# Altium PCB WARROX_final.PcbDoc
Units mm, origin at the board's own origin, x right, y up, seen from the top; angles counter-clockwise.
Board outline 40 x 40 mm, 4 copper layers (L1 (Sig), L2 (GND), L3 (GND), L4 (Sig)), stack 1.57 mm thick; 84 components, 49 nets, 286 pads, 167 vias.
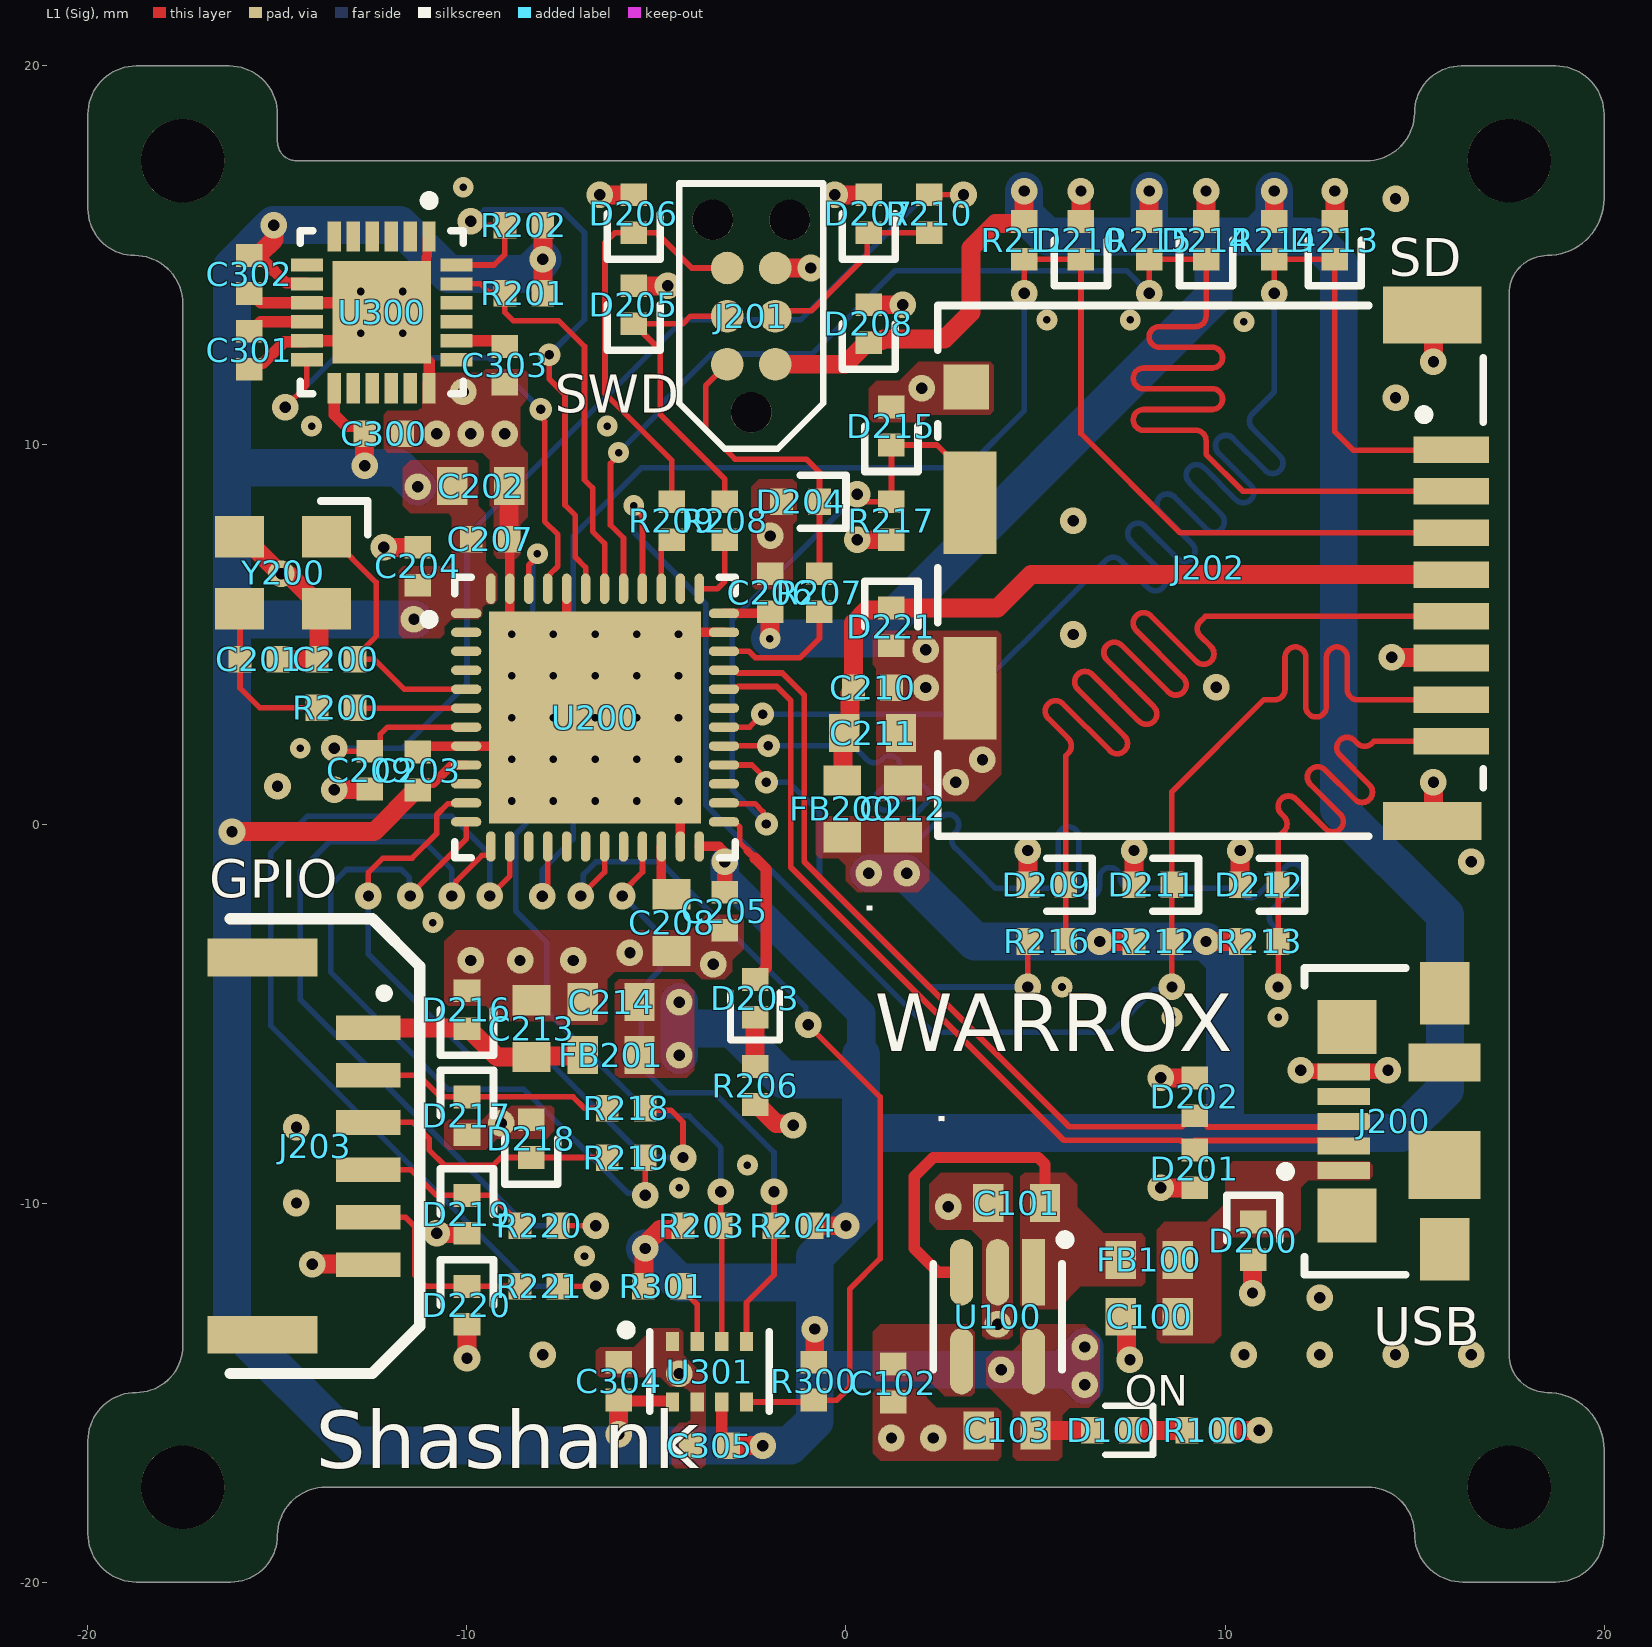
[diagram p0: L1 (Sig) view]
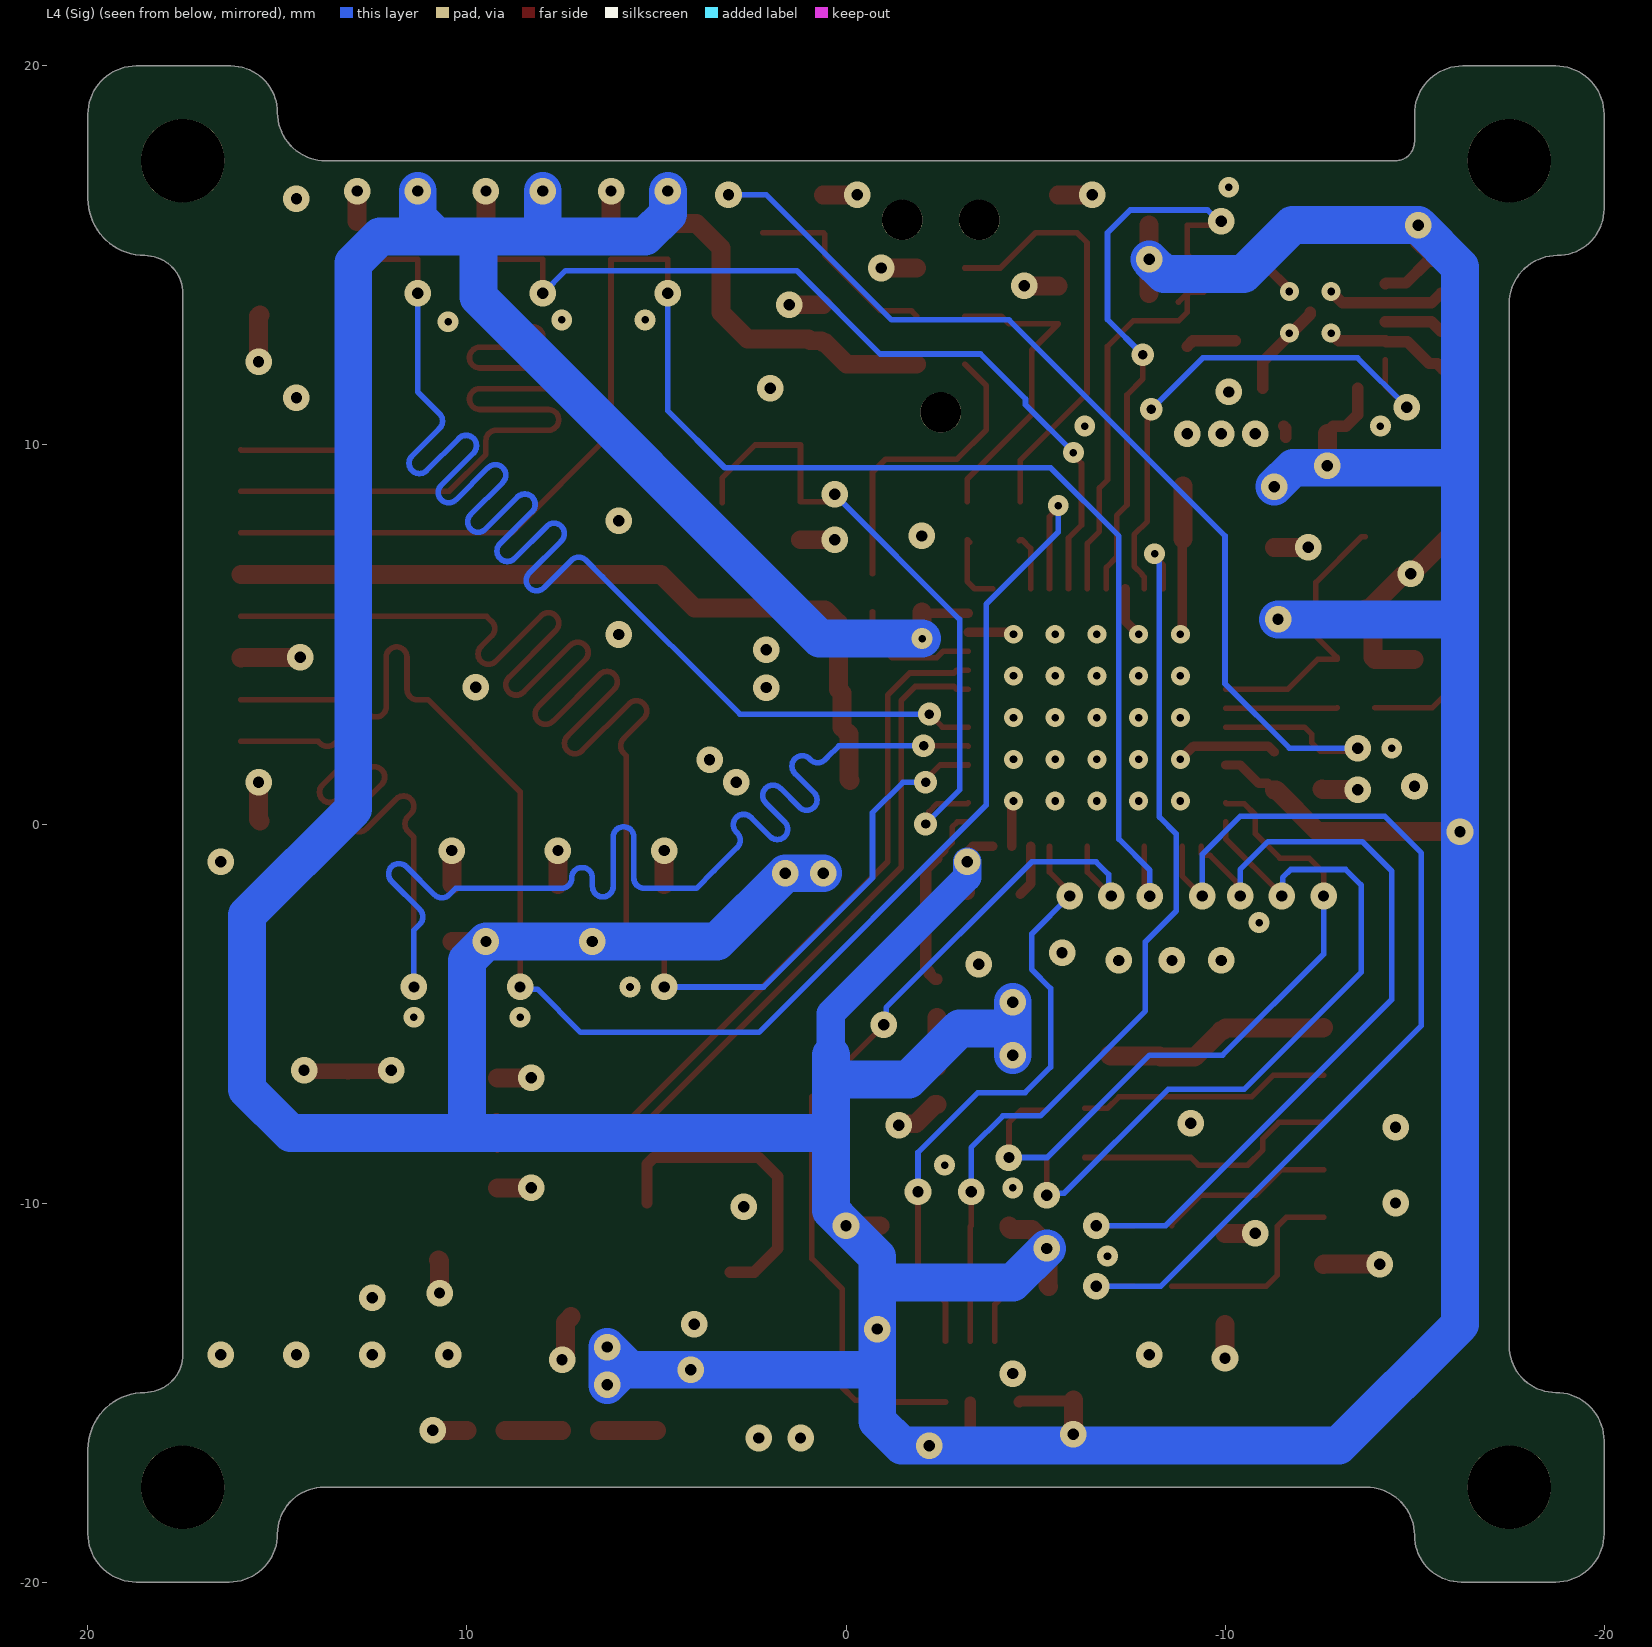
[diagram p1: L4 (Sig) view, seen from below]
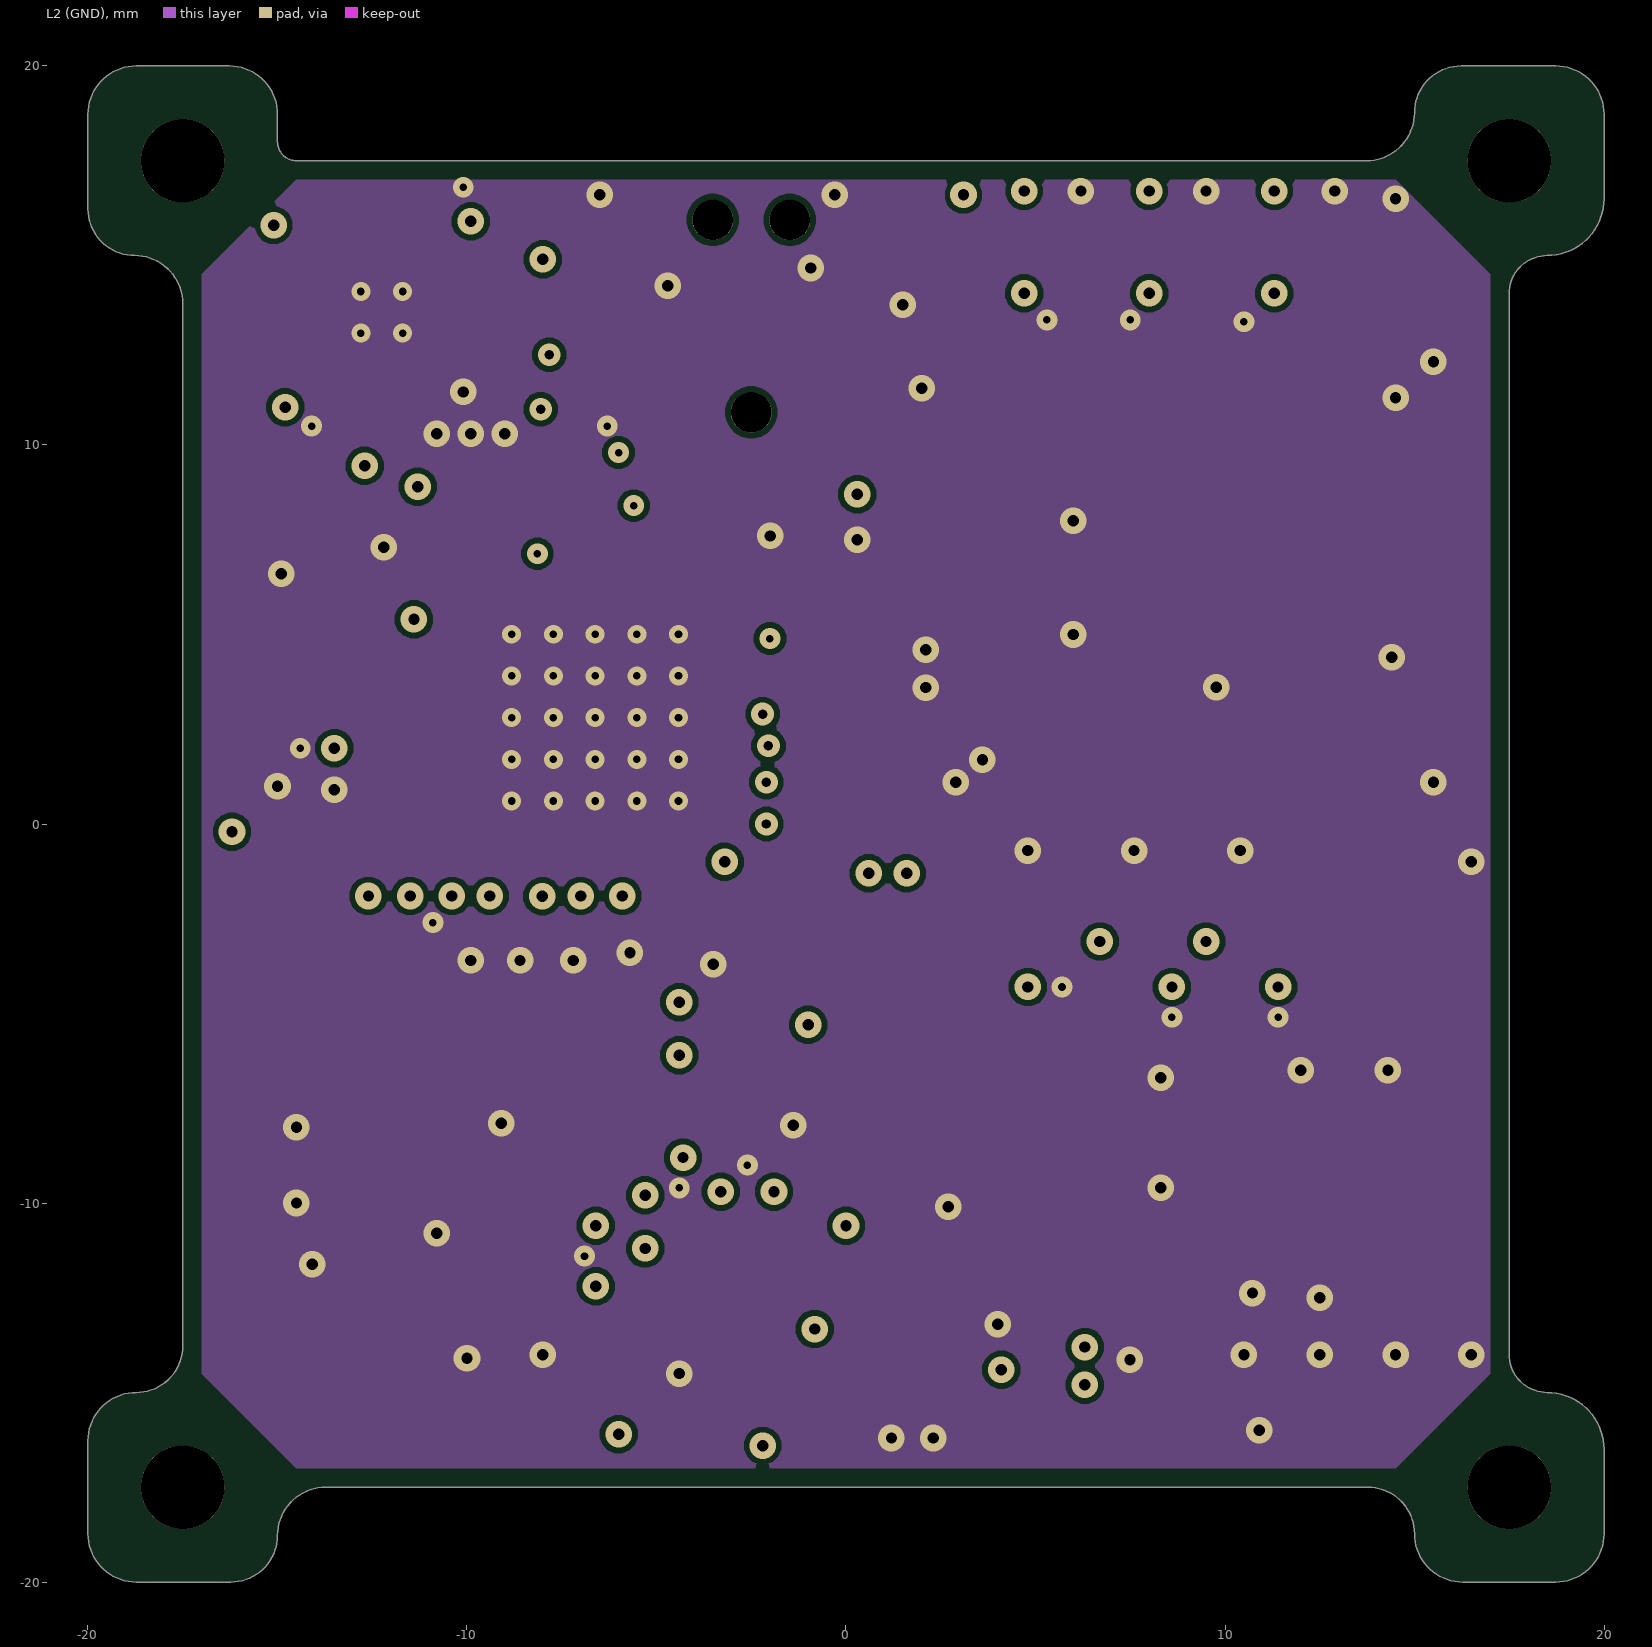
[diagram p2: L2 (GND)]
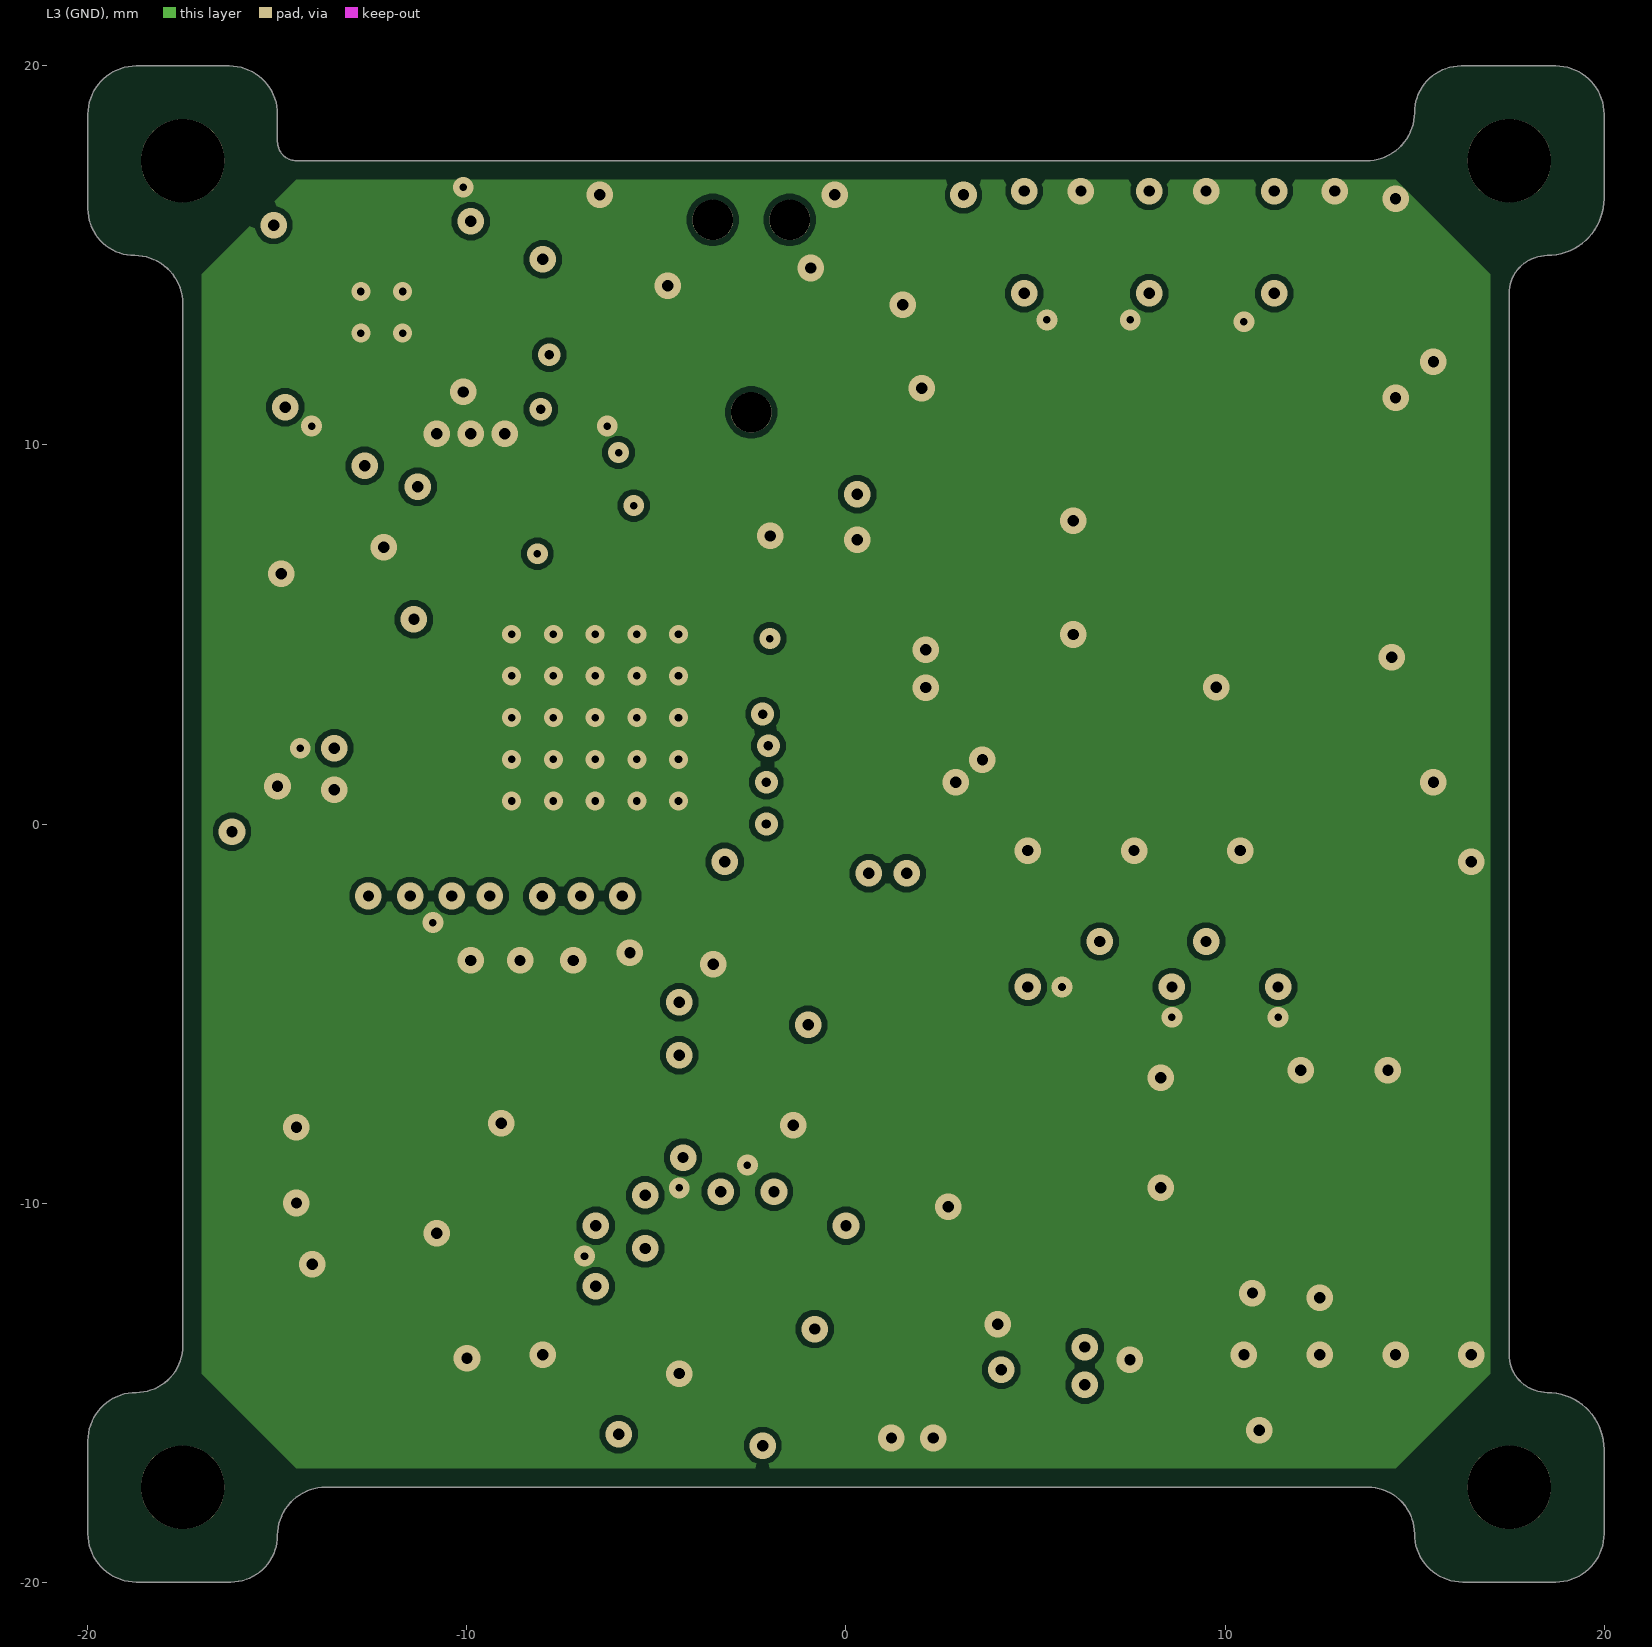
[diagram p3: L3 (GND)]
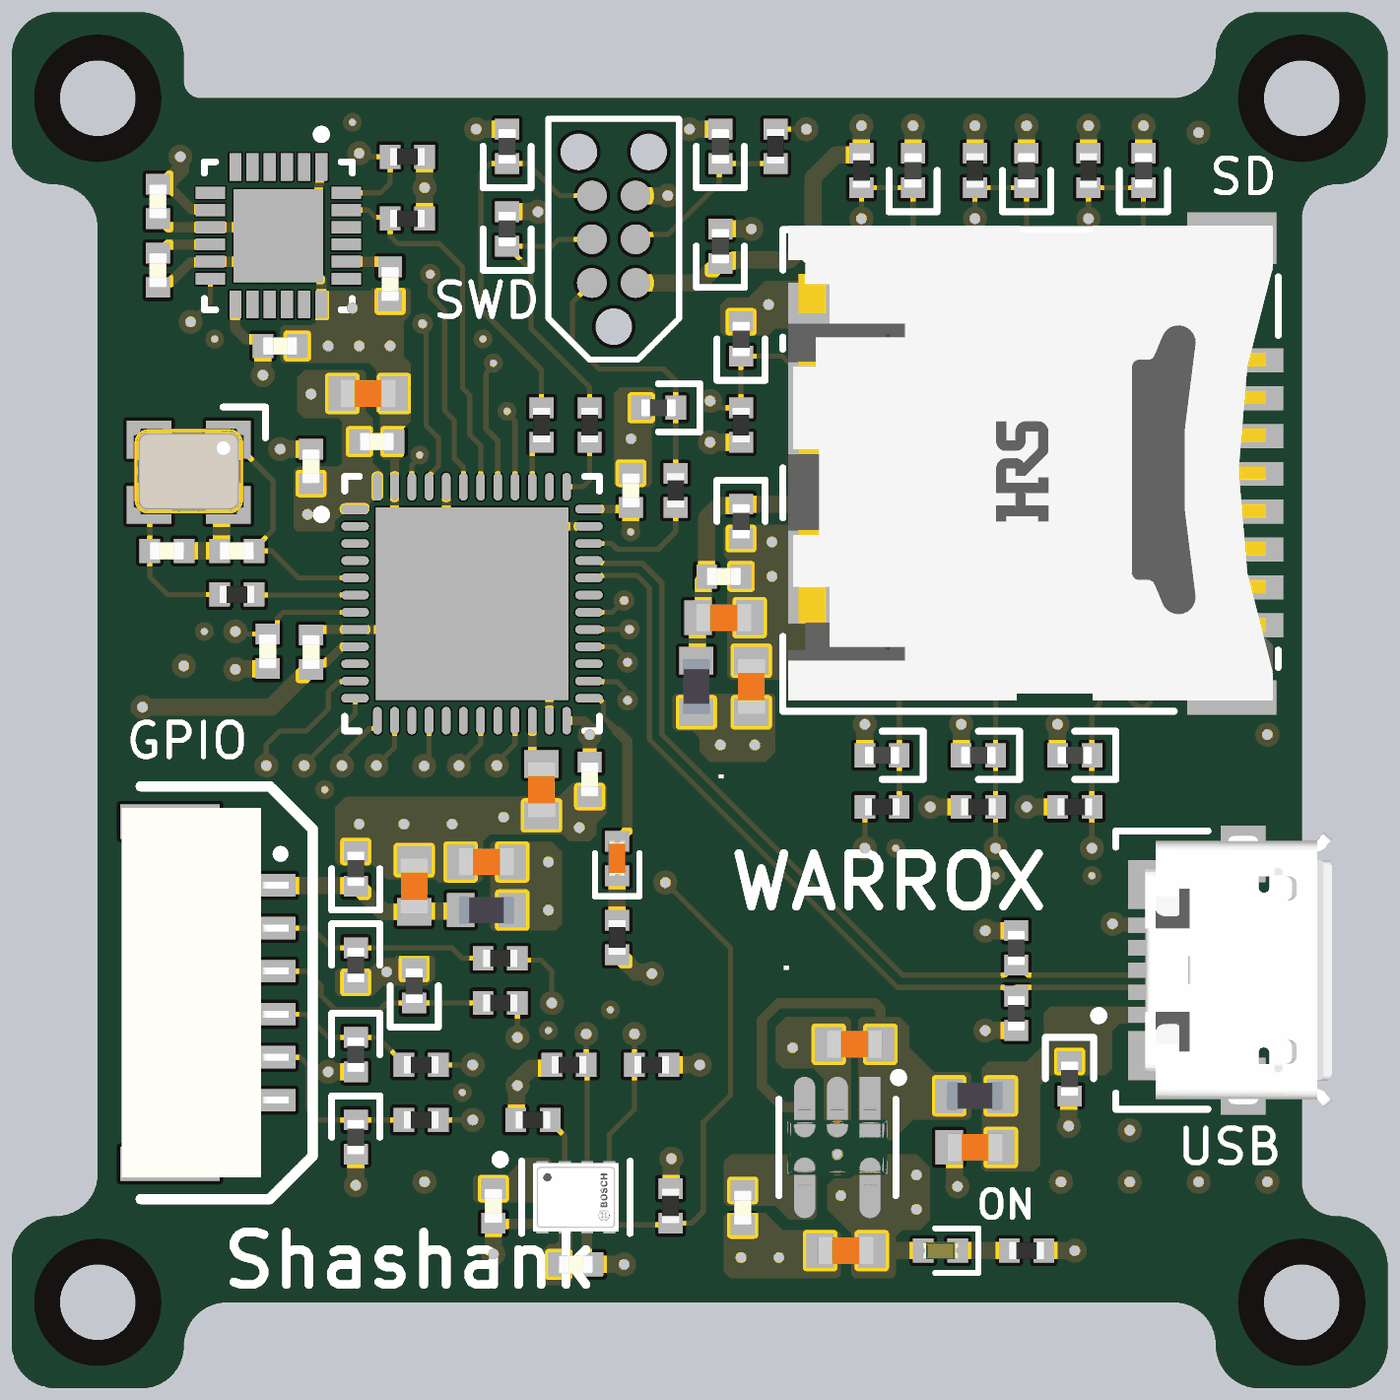
[diagram p4: 3D render of the assembled board from above, using the file's embedded part models]

## Layer stack, top to bottom
Top Solder: solder mask 0.0254, SM-001, Dk 4
L1 (Sig): signal copper 0.035
Dielectric 2: prepreg 0.1, PP-017, Dk 4.6
L2 (GND): signal copper 0.0175
Dielectric 3: core 1.265, Core-039, Dk 4.6
L3 (GND): signal copper 0.0175
Dielectric 4: prepreg 0.1, PP-017, Dk 4.6
L4 (Sig): signal copper 0.035
Bottom Solder: solder mask 0.0254, SM-001, Dk 4

## Board outline
-20,-18.73 -20,-16.27 cw(c-18.73,-16.27) -18.73,-15 ccw(c-18.73,-13.77) -17.5,-13.77 -17.5,13.73 ccw(c-18.77,13.73) -18.77,15 cw(c-18.77,16.23) -20,16.23 -20,18.73 cw(c-18.73,18.73) -18.73,20 -16.27,20 cw(c-16.27,18.73) -15,18.73 -15,18 ccw(c-14.5,18) -14.5,17.5 13.73,17.5 ccw(c13.73,18.77) 15,18.77 cw(c16.23,18.77) 16.23,20 18.73,20 cw(c18.73,18.73) 20,18.73 20,16.5 cw(c18.5,16.5) 18.5,15 ccw(c18.5,14) 17.5,14 17.5,-14 ccw(c18.5,-14) 18.5,-15 cw(c18.5,-16.5) 20,-16.5 20,-18.73 cw(c18.73,-18.73) 18.73,-20 16.27,-20 cw(c16.27,-18.73) 15,-18.73 ccw(c13.77,-18.73) 13.77,-17.5 -13.73,-17.5 ccw(c-13.73,-18.77) -15,-18.77 cw(c-16.23,-18.77) -16.23,-20 -18.73,-20 cw(c-18.73,-18.73)

## Design rules (kind name [scope] priority, off if disabled: settings)
Clearance [All] p1: gap=0.15 ignorepadtopadclearanceinfootprint=FALSE
DiffPairsRouting [All] p1: maxlimit=0.254 minlimit=0.203 mostfreqgap=0.254 toplayer_maxgap=0.203 toplayer_prefgap=0.203 toplayer_minwidth=0.153 toplayer_maxwidth=0.153 toplayer_prefwidth=0.153 bottomlayer_maxgap=0.203 bottomlayer_prefgap=0.203 bottomlayer_minwidth=0.153 bottomlayer_maxwidth=0.153 bottomlayer_prefwidth=0.153 impedanceprofiledriven=TRUE impedanceprofileid={C68166D5-ADCB-4A58-9F66-7FDBBDD7FCB3} impedanceprofilevalue=90.000000 maxuncoupledlength=12.7
PolygonConnect [All] p1: connectstyle=Direct reliefconductorwidth=0.254 reliefentries=4 polygonreliefangle="90 Angle" airgapwidth=0.254
RoutingVias [All] p1: holewidth=0.711 width=1.27 viastyle="Through Hole" minholewidth=0.711 minwidth=1.27 maxholewidth=0.711 maxwidth=1.27
SolderMaskExpansion [All] p1: expansion=0.102 istentingtop=FALSE
Width [All] p1: maxlimit=1 minlimit=0.127 preferedwidth=0.293 midlayer1_maxwidth=0.254 midlayer1_prefwidth=0.254 midlayer2_maxwidth=0.254 midlayer2_prefwidth=0.254 minimp=50.000000 maximp=50.000000 favimp=50.000000
29 further rules are at their usual default settings.

## Classes and differential pairs
net class USB: MCU_USB_D_N MCU_USB_D_P
net class SD: MCU_SDIO_CK MCU_SDIO_CMD MCU_SDIO_D0 MCU_SDIO_D1 MCU_SDIO_D2 MCU_SDIO_D3 SD_CLK
differential pair class DIFF_USB_FS: MCU_USB_D
differential pair MCU_USB_D: +MCU_USB_D_P -MCU_USB_D_N

## Components (designator, comment, footprint, x,y, rotation, side; value= is the part's Value field where it differs from the comment)
C100 "2u2" CAP_0603 8,-13 r0 top
C101 "2u2" CAP_0603 4.5,-10 r0 top
C102 "470p" CAP_0402 1.25,-14.75 r90 top
C103 "2u2" CAP_0603 4.25,-16 r0 top
C200 "10p" CAP_0402 -13.457,4.343 r0 top
C201 "10p" CAP_0402 -15.489,4.343 r180 top
C202 "2u2" CAP_0603 -9.639,8.915 r180 top
C203 "100n" CAP_0402 -11.3,1.4 r270 top
C204 "100n" CAP_0402 -11.3,6.8 r270 top
C205 "100n" CAP_0402 -3.2,-2.3 r90 top
C206 "100n" CAP_0402 -2,6.1 r270 top
C207 "100n" CAP_0402 -9.385,7.518 r180 top
C208 "2u2" CAP_0603 -4.6,-2.6 r90 top
C209 "100n" CAP_0402 -12.56,1.422 r90 top
C210 "100n" CAP_0402 0.7,3.6 r180 top
C211 "2u2" CAP_0603 0.7,2.4 r180 top
C212 "2u2" CAP_0603 1.5,0.4 r270 top
C213 "2u2" CAP_0603 -8.3,-5.4 r270 top
C214 "2u2" CAP_0603 -6.2,-4.7 r0 top
C300 "100n" CAP_0402 -12.2,10.3 r180 top
C301 "100n" CAP_0402 -15.75,12.5 r90 top
C302 "10n" CAP_0402 -15.75,14.5 r90 top
C303 "2n2" CAP_0402 -9,12.1 r90 top
C304 "100n" CAP_0402 -6,-14.7 r270 top
C305 "100n" CAP_0402 -3.6,-16.4 r0 top
D100 "GREEN" LED_0402_GREEN 7,-16 r0 top
D200 "RCLAMP0521P-N" D_0402 10.75,-11 r90 top
D201 "RCLAMP0521P-N" D_0402 9.2,-9.1 r90 top
D202 "RCLAMP0521P-N" D_0402 9.2,-7.2 r270 top
D203 "RED" LED_0402_RED -2.4,-4.6 r270 top
D204 "RCLAMP0521P-N" D_0402 -1.2,8.5 r0 top
D205 "RCLAMP0521P-N" D_0402 -5.6,13.7 r270 top
D206 "RCLAMP0521P-N" D_0402 -5.6,16.1 r270 top
D207 "RCLAMP0521P-N" D_0402 0.6,16.1 r270 top
D208 "RCLAMP0521P-N" D_0402 0.6,13.2 r270 top
D209 "RCLAMP0521P-N" D_0402 5.3,-1.6 r0 top
D210 "RCLAMP0521P-N" D_0402 6.2,15.4 r270 top
D211 "RCLAMP0521P-N" D_0402 8.1,-1.6 r0 top
D212 "RCLAMP0521P-N" D_0402 10.9,-1.6 r0 top
D213 "RCLAMP0521P-N" D_0402 12.9,15.4 r270 top
D214 "RCLAMP0521P-N" D_0402 9.5,15.4 r270 top
D215 "RCLAMP0521P-N" D_0402 1.2,10.5 r270 top
D216 "RCLAMP0521P-N" D_0402 -10,-4.9 r270 top
D217 "RCLAMP0521P-N" D_0402 -10,-7.7 r90 top
D218 "RCLAMP0521P-N" D_0402 -8.3,-8.3 r270 top
D219 "RCLAMP0521P-N" D_0402 -10,-10.3 r90 top
D220 "RCLAMP0521P-N" D_0402 -10,-12.7 r90 top
D221 "RCLAMP0521P-N" D_0402 1.2,5.2 r90 top
FB100 "100R" FB_0603 8,-11.5 r180 top
FB200 "100R" FB_0603 -0.1,0.4 r270 top
FB201 "100R" FB_0603 -6.2,-6.1 r0 top
J200 "473460001" FP-473460001-MFG 15.447,-7.844 r90 top
J201 "TC-2030NL" TC2030-NL-FP -2.5,13.4 r90 top
J202 "DM3CS-SF" FP-DM3CS-SF-MFG 9.617,6.68 r90 top locked
J203 "SM06B-GHS-TB" SM06B-GHS-TB -14,-8.5 r270 top
R100 "1k" RES_0402 9.5,-16 r180 top
R200 "22R" RES_0402 -13.457,3.073 r0 top
R201 "2k2" RES_0402 -8.5,14 r0 top
R202 "2k2" RES_0402 -8.5,15.8 r0 top
R203 "2k2" RES_0402 -3.8,-10.6 r180 top
R204 "2k2" RES_0402 -1.4,-10.6 r0 top
R206 "1k" RES_0402 -2.4,-6.9 r90 top
R207 "22R" RES_0402 -0.7,6.1 r90 top
R208 "22R" RES_0402 -3.2,8 r90 top
R209 "22R" RES_0402 -4.6,8 r90 top
R210 "22R" RES_0402 2.2,16.1 r270 top
R211 "10k" RES_0402 4.7,15.4 r90 top
R212 "10k" RES_0402 8.1,-3.1 r180 top
R213 "10k" RES_0402 10.9,-3.1 r180 top
R214 "10k" RES_0402 11.3,15.4 r90 top
R215 "10k" RES_0402 8,15.4 r90 top
R216 "22R" RES_0402 5.3,-3.1 r180 top
R217 "1M" RES_0402 1.2,8 r90 top
R218 "22R" RES_0402 -5.8,-7.5 r0 top
R219 "22R" RES_0402 -5.8,-8.8 r0 top
R220 "22R" RES_0402 -8.1,-10.6 r0 top
R221 "22R" RES_0402 -8.1,-12.2 r0 top
R300 "10k" RES_0402 -0.85,-14.7 r90 top
R301 "10k" RES_0402 -4.85,-12.2 r180 top
U100 "MIC5219-3.3YM5-TR" FP-SOT23-5LD-PL-1-IPC_A 4,-13 r270 top
U200 "STM32F411CEU6" STM-UFQFPN48_L -6.62,2.807 r0 top
U300 "MPU-6050" IS-QFN-24_V -12.25,13.5 r270 top
U301 "SPL06-001" FP-BMP280-MFG -3.6,-14.45 r90 top
Y200 "16MHz" XTAL_3225 -14.854,6.629 r180 top value=24MHz

## Footprints (in the part's own frame and the unit in brackets; to place one, negate y for a bottom-side part, rotate by r counter-clockwise, add the part's x,y. Pads: shape width x height; smd on the part's side, far side on the other; paste and mask are expansions set on the pad)
CAP_0402 [mm]
  rect 0.6x0.7 smd: 1(-0.5,0) 2(0.5,0)
  body extent -0.5,-0.26 0.5,0.26, height 0.37
CAP_0603 [mm]
  rect 0.8x1 smd: 1(-0.75,0) 2(0.75,0)
  body extent -0.8,-0.4 0.8,0.4, height 0.51
D_0402 [mm]
  rect 0.6x0.7 smd: A(-0.5,0) K(0.5,0)
  silkscreen extent 0,-0.7 1.2,0.7, body extent -0.5,-0.25 0.5,0.25, height 0.51
FB_0603 [mm]
  rect 0.8x1 smd: 1(-0.75,0) 2(0.75,0)
  body extent -0.8,-0.4 0.8,0.4, height 0.81
FP-473460001-MFG [mm]
  rect 0.45x1.38 smd paste+0 mask+0: 1(-1.3,2.31) 2(-0.65,2.31) 3(0,2.31) 4(0.65,2.31) 5(1.3,2.31)
  rect 1.425x1.55 smd paste+0 mask+0: 6(-2.488,2.225) 7(2.488,2.225)
  rect 1.65x1.3 smd paste+0 mask+0: 8(-3.375,-0.35) 11(3.375,-0.35)
  rect 1.8x1.9 smd paste+0 mask+0: 9(-1.15,-0.35)
  rect 1x1.9 smd paste+0 mask+0: 10(1.55,-0.35)
  silkscreen extent -4.05,0.67 4.05,3.97, body extent -4.3,-2.48 4.3,3.45, height 0.25
FP-BMP280-MFG [mm]
  rect 0.5x0.35 smd paste+0 mask+0: 1(0.8,0.975) 2(0.8,0.325) 3(0.8,-0.325) 4(0.8,-0.975) 5(-0.8,-0.975) 6(-0.8,-0.325) 7(-0.8,0.325) 8(-0.8,0.975)
  silkscreen extent -1.05,-1.58 1.22,2.32, body extent -1.55,-1.8 1.55,1.8, height 0.25
FP-DM3CS-SF-MFG [mm]
  rect 0.7x2 smd paste+0 mask+0: 1(3.2,-6.35) 2(2.1,-6.35) 3(1,-6.35) 4(-0.1,-6.35) 5(-1.2,-6.35) 6(-2.3,-6.35) 7(-3.4,-6.35) 8(-4.5,-6.35)
  rect 2.7x1.4 smd paste+0 mask+0: 9(-3.1,6.35) 10(1.8,6.35)
  rect 1.2x1.2 smd paste+0 mask+0: 11(4.85,6.45)
  rect 1x2.6 smd paste+0 mask+0: 12(-6.6,-5.85)
  rect 1.5x2.6 smd paste+0 mask+0: 13(6.75,-5.85)
  silkscreen extent -7,-7.2 7,7.2, body extent -6.68,-7.05 7.12,7.05, height 2.13
FP-SOT23-5LD-PL-1-IPC_A [mm]
  rect 1.756x0.61 smd paste+0 mask+0: 1(-1.175,0.95)
  rrect100% 1.756x0.61 smd paste+0 mask+0: 2(-1.175,0) 3(-1.175,-0.95) 4(1.175,-0.95) 5(1.175,0.95)
  silkscreen extent -2.16,-1.7 1.4,1.9, body extent -2.55,-1.95 2.55,1.95, height 0.25
IS-QFN-24_V [mm] "QFN, 24-Leads, Body 4x4mm, Pitch 0.5mm, Thermal Pad 2.7x2.6mm"
  rect 0.8x0.35 smd mask+0.05: 1(-2,1.25) 2(-2,0.75) 3(-2,0.25) 4(-2,-0.25) 5(-2,-0.75) 6(-2,-1.25) 13(2,-1.25) 14(2,-0.75) 15(2,-0.25) 16(2,0.25) 17(2,0.75) 18(2,1.25)
  rect 0.35x0.85 smd mask+0.05: 7(-1.25,-1.975) 8(-0.75,-1.975) 9(-0.25,-1.975) 10(0.25,-1.975) 11(0.75,-1.975) 12(1.25,-1.975) 19(1.25,1.975) 20(0.75,1.975) 21(0.25,1.975) 22(-0.25,1.975) 23(-0.75,1.975) 24(-1.25,1.975)
  rect 2.7x2.6 smd mask+0.05: 25(0,0)
  silkscreen extent -3.07,-2.15 2.15,2.15, body extent -2,-2 2,2, height 0.95
LED_0402_GREEN [mm]
  rect 0.6x0.7 smd: A(-0.5,0) K(0.5,0)
  silkscreen extent -0.15,-0.65 1.1,0.65, body extent -0.51,-0.25 0.51,0.25, height 0.45
LED_0402_RED [mm]
  rect 0.6x0.7 smd: A(-0.5,0) K(0.5,0)
  silkscreen extent -0.15,-0.65 1.1,0.65, body extent -0.51,-0.25 0.51,0.25, height 0.45
RES_0402 [mm]
  rect 0.6x0.7 smd: 1(-0.5,0) 2(0.5,0)
  body extent -0.5,-0.25 0.5,0.25, height 0.3
SM06B-GHS-TB [mm]
  rect 0.65x1.7 smd: 1(-3.125,1.4) 2(-1.875,1.4) 3(-0.625,1.4) 4(0.625,1.4) 5(1.875,1.4) 6(3.125,1.4)
  rect 1x2.9 smd: ""(-4.975,-1.4) ""(4.975,-1.4)
  silkscreen extent -6,-2.25 6,2.75, body extent -5.38,-2.8 5.38,2.05, height 4.26
STM-UFQFPN48_L [mm] "QFN, 48-Leads, Body 7.1x7.1mm, Pitch 0.5mm, Thermal Pad 5.6x5.6mm, IPC High Density"
  oval 0.8x0.25 smd mask+0.05: 1(-3.4,2.75) 2(-3.4,2.25) 3(-3.4,1.75) 4(-3.4,1.25) 5(-3.4,0.75) 6(-3.4,0.25) 7(-3.4,-0.25) 8(-3.4,-0.75) 9(-3.4,-1.25) 10(-3.4,-1.75) 11(-3.4,-2.25) 12(-3.4,-2.75) 25(3.4,-2.75) 26(3.4,-2.25) 27(3.4,-1.75) 28(3.4,-1.25) 29(3.4,-0.75) 30(3.4,-0.25) 31(3.4,0.25) 32(3.4,0.75) 33(3.4,1.25) 34(3.4,1.75) 35(3.4,2.25) 36(3.4,2.75)
  oval 0.25x0.8 smd mask+0.05: 13(-2.75,-3.4) 14(-2.25,-3.4) 15(-1.75,-3.4) 16(-1.25,-3.4) 17(-0.75,-3.4) 18(-0.25,-3.4) 19(0.25,-3.4) 20(0.75,-3.4) 21(1.25,-3.4) 22(1.75,-3.4) 23(2.25,-3.4) 24(2.75,-3.4) 37(2.75,3.4) 38(2.25,3.4) 39(1.75,3.4) 40(1.25,3.4) 41(0.75,3.4) 42(0.25,3.4) 43(-0.25,3.4) 44(-0.75,3.4) 45(-1.25,3.4) 46(-1.75,3.4) 47(-2.25,3.4) 48(-2.75,3.4)
  rect 5.6x5.6 smd mask+0.05: 49(0,0)
  silkscreen extent -4.5,-3.7 3.7,3.7, body extent -3.55,-3.55 3.55,3.55, height 0.6
TC2030-NL-FP [mil]
  round 33.98 smd: 1(-50,-25) 2(-50,25) 3(0,-25) 4(0,25) 5(50,-25) 6(50,25)
  round 42.01 hole 42.01 unplated: MH(-100,0) MH(100,-40) MH(100,40)
  silkscreen extent -138,-75 138,75
XTAL_3225 [mm]
  rect 1.3x1.1 smd: 1(-1.15,-0.95) 2(1.15,-0.95) 3(1.15,0.95) 4(-1.15,0.95)
  silkscreen extent -2.23,-1.89 -1,-1, body extent -1.6,-1.28 1.6,1.22, height 0.61

## Part data
C100 C101 C103 C202 C208 C211 C212 C213 C214: library part CAP_0603_16V, "Capacitor SMD 0603 16V"
C102 C200 C201 C203 C204 C205 C206 C207 C209 C210 C300 C301 C302 C303 C304 C305: library part CAP_0402_16V, "Capacitor SMD 0402 16V"
D100: library part LED_0402_GREEN, "LED 0402 GREEN SMD"
D200 D201 D202 D204 D205 D206 D207 D208 D209 D210 D211 D212 D213 D214 D215 D216 D217 D218 D219 D220 D221: library part D_TVS_0402, "Diode TVS / ESD 0402"
D203: library part LED_0402_RED, "LED 0402 RED SMD"
FB100 FB200 FB201: library part FB_0603, "Ferrite Bead SMD 0603"
J200: library part CMP-2000-05246-2, "CONN RCPT USB2.0 MICRO B SMD R/A", Current Rating=1.8A, Manufacturer=Molex, Package=0, Temperature="-30°C to +85°C", Temperature Range High=+85°C, Temperature Range Low=-30°C, Voltage Rating=30V, Automotive=No, Category=Conn, ComponentLink2Description=Datasheet, ComponentLink2URL=https://www.molex.com/webdocs/datasheets/pdf/en-us/0473460001_IO_CONNECTORS.pdf, Conn Orientation="Right Angle", Contact Material=Gold,Nickel, Device Class L1=Connectors, Device Class L2="USB Connectors", Device Class L3=unset, Digikey Description="CONN RCPT USB2.0 MICRO B SMD R/A", Footprint Url=https://www.molex.com/pdm_docs/sd/473460001_sd.pdf, Height=2.945mm, Is Female=yes, Lead Free=Yes, Manufacturer Part Number=473460001, Number Of Contacts=5, Octopart=https://octopart.com/47346-0001-molex-7164928, Pitch=0.65mm, RoHS=TRUE, Shielding=true, Usb Standard="USB 2.0"
J201: library part TC2030-NL, "Tag-Connect No-Solder SWD Debug Connector (No Legs) DO NOT PLACE", Manufacturer=Tag-Connect, Manfucaturer Number=TC2030-NL-FP
J202: library part CMP-11597-000003-1, "CONN MICRO SD CARD HINGED TYPE", Contact Resistance=100mR, Current Rating=500mA, Flammability Rating="UL94 V-0", Insulation Resistance=1GR, Max Operating Temperature=85°C, Min Operating Temperature=-25°C, Package Quantity=1, Voltage Rating (AC)=125V, Connector Type=Connector, Contact Material=Gold, Contact Plating=Gold, Depth=1.83mm, Gender=Female, Housing Material=Polymer, Lead Free="Lead Free", Length=14.1mm, Max Current Rating=500mA, Mount="Surface Mount", Number Of Contacts=8, Number of Positions=8, Number of Rows=1, Orientation="Right Angle", Packaging="Tape and Reel", Pitch=1.1mm, Radiation Hardening=No, Termination=Solder, Width=13.8mm
J203: "Header Connector 6 Position 1.25MM Pitch SMD Horizontal JST GH", Manufacturer=JST, Manufacturer Part Number=SM06B-GHS-TB
R100 R200 R201 R202 R203 R204 R206 R207 R208 R209 R210 R211 R212 R213 R214 R215 R216 R217 R218 R219 R220 R221 R300 R301: library part RES_0402, "Resistor SMD 0402"
U100: library part CMP-06324-000027-1, "IC REG LINEAR 3.3V 500MA SOT23-5", Case/Package=SOT-23-5, Dropout Voltage=350mV, Max Input Voltage=12V, Max Operating Temperature=125°C, Min Input Voltage=2.5V, Min Operating Temperature=-40°C, Nominal Output Voltage=3.3V, Output Current=500mA, Lead Free="Lead Free", Mount="Surface Mount", Number of Pins=5, Number of Regulators=1, Output Type=Fixed, Output Voltage=3.3V, Packaging="Cut Tape", REACH SVHC="No SVHC"
U200: library part CMP-0243-00165-1, "ARM Cortex-M4 32-bit MCU+FPU, 512 KB Flash, 128 KB RAM, 36 I/Os, 48-Pin UFQFPN, -40 to 85 degC, Tray", I/Os (High Current)=36, Operating Frequency(F) (Processor speed) (MHz)=100, Package Description=UFQFPN48, Package Reference="48-Pin Ultra Thin Fine Pitch Quad Flat No-Lead, 7 x 7 x 0.6 mm Body, 0.5 mm Pitch, Exposed Pad", Supply Voltage(Vcc) min (V)=1.7, ComponentLink1Description="Manufacturer URL", ComponentLink1URL=http://www.st.com/, ComponentLink2Description=Datasheet, ComponentLink2URL=http://www.st.com/st-web-ui/static/active/en/resource/technical/document/datasheet/DM00115249.pdf, Core="ARM Cortex-M4", DatasheetVersion="Rev. 6", FLASH Size (Prog) (kB)=512, Internal RAM Size (kB)=128, Mounting Technology="Surface Mount", Packing=Tray
U300: library part CMP-1753-00002-2, "3-Axis Gyroscope, Accelerometer and a Digital Motion Processor(TM) (DMP), 2.375 to 3.46 V, -40 to 85 degC, 24-Pin QFN, RoHS, Tape and Reel", Manufacturer=InvenSense, Standard Package=5,000, Category=Sensors,Transducers, Datasheet URL=http://datasheet.octopart.com/MPU-6050-InvenSense-datasheet-14421344.pdf, Datasheet Version="Rev. 3.3, 05/2012", Dynamic Catalog=MPU-6000™Series, Family=Multifunction, Featured Product=MPU-60506-Axis,IntegratedI²CSolution, Manufacturer URL=http://www.invensense.com/, Online Catalog=MPU-6000™Series, Other Names="1428-1007-2 / MPU6050", Output Type=Digital, Sensor Type=MotionTracking, Unit PriceUSD=Digital
U301: library part CMP-2000-05076-3, "SENSOR PRESSURE ABS", Case/Package=SMD/SMT, Max Operating Temperature=85°C, Min Operating Temperature=-40°C, Operating Pressure=15.95PSI, Lead Free="Lead Free", Max Pressure=290.08PSI, Number of Pins=8, Output Type=SPI, Port Style="No Port", Pressure Type=Absolute, Termination=SMD/SMT
Y200: library part TSX-3225_24.0000MF15X-AC, "Crystal SMD 24MHz 10PPM 7pF 3225", Load Capacitance=7pF, Manufacturer=Epson, Manufacturer Number="TSX-3225 24.0000MF15X-AC", ESR=40R, Type=XTAL

## Free pads (board coordinates)
  round 2.2 hole 2.2 unplated mask+0.75: MH(-17.5,-17.5) MH(-17.5,17.5) MH(17.5,-17.5) MH(17.5,17.5)

## Via types
v1: diameter 0.7, hole 0.3, L1 (Sig) to L4 (Sig), tented both sides, 113 vias
v2: diameter 0.5, hole 0.2, L1 (Sig) to L4 (Sig), 29 vias
v3: diameter 0.55, hole 0.2, L1 (Sig) to L4 (Sig), tented both sides, 18 vias
v4: diameter 0.6, hole 0.25, L1 (Sig) to L4 (Sig), tented both sides, 6 vias
v5: diameter 0.7/0.7/0.7/0.7 (per signal layer), hole 0.3, L1 (Sig) to L4 (Sig), tented both sides, 1 vias

## Nets (pads, with @x,y where several pads share a name; then routed paths per layer and width w, separated by ;. In a path a pad name is that pad's centre, name@x,y a point inside that pad or via, vN(x,y) a via of type N, cw(c..) or ccw(c..) an arc to the next point about the centre after c; other vN are vias at no path point)
+3V3: C103.2 C202.2 C203.2 C204.2 C205.2 C206.2 C207.2 C212.2 C214.2 C300.2 C302.2 C304.2 C305.2 D100.A D208.K FB200.2 FB201.2 J201.1 R201.2 R202.2 R203.2 R204.2 R211.2 R212.2 R213.2 R214.2 R215.2 R300.2 R301.2 U100.5 U200.1 U200.9 U200.24 U200.36 U200.48 U300.8 U300.13 U301.6 U301.8 | length 225.2
  L1 (Sig) w0.25: C203.2 -11.125,1.075 -10.886,1.075 -10.404,1.557 U200.9 ; U200.24 -3.346,-0.593 -3.2,-0.739 v1(-3.2,-1) ; U200.36 -2.043,5.557 -2.003,5.597 C206.2
  L1 (Sig) w0.3: C302.2 -15.6,14.85 -15.349,14.85 -14.774,14.275 -14.25,14.275 U300.8 ; U300.13 -13.5,10.8 -13.193,10.493 -12.85,10.493 -12.7,10.343 C300.2 ; C300.2@-12.75,10 C300.2@-12.75,10.05 ; C304.2 -5.975,-15.225 -4.6,-15.225 U301.8 ; U301.6 -3.275,-16.175 -3.1,-16.35 C305.2 ; v1@-3.2,-1.2 v1(-3.2,-1)
  L1 (Sig) w0.4: C205.2 v1@-3.2,-1.2
  L1 (Sig) w0.5: v1(-16.2,-0.2) -12.45,-0.2 -11.35,0.9 C203.2 ; C302.2 -15.7,15.05 -15.463,15.05 -15.09,15.423 -15.09,15.79 v1(-15.1,15.8) ; v1(-12.7,9.45) C300.2 ; R201.2 v1(-8,14.9) R202.2 ; v1(-6,-16.1) C304.2 ; R301.2 -5.325,-12.175 v1@-5.325,-11.225 ; v1(-5.3,-11.2) -5.262,-11.162 -5.262,-11.055 -4.907,-10.7 -4.35,-10.7 -4.3,-10.65 R203.2 ; C305.2 v1(-2.2,-16.4) ; v3(-2.006,4.892) -2.003,4.895 C206.2@-2.003,5.597 ; J201.1 -0.02,12.13 0.55,12.7 D208.K 0.65,12.75 0.943,12.75 0.993,12.8 2.6,12.8 3.3,13.5 3.3,15.2 3.95,15.85 4.65,15.85 R211.2 v1(4.7,16.7) ; R204.2 v1(0,-10.6) ; R300.2 -0.825,-14.175 v1(-0.825,-13.325) ; C103.2 D100.A ; v1(6.7,-3.1) R212.2 ; R215.2 v1(8,16.7) ; v1(9.5,-3.1) R213.2 ; R214.2 v1(11.3,16.7)
  L4 (Sig) w0.75: v1(-3.2,-1) -3.2,-1.4 0.4,-5 0.4,-6.1
  L4 (Sig) w1: v1(-11.4,5.4) -16.1,5.4 -16.2,5.3 ; v1(-11.3,8.9) -11.8,9.4 -16.2,9.4 ; v1(-8,14.9) -8.393,14.507 -10.49,14.507 -11.783,15.8 v1(-15.1,15.8) -16.2,14.7 -16.2,9.4 ; v1(-5.3,-11.2) -4.4,-12.1 -0.825,-12.1 ; v1(-4.4,-6.1) -4.4,-5.4 ; v1(-4.4,-4.7) -4.4,-5.4 ; v3(-2.006,4.892) 0.692,4.892 9.7,13.9 9.7,14.914 ; -0.825,-14.339 v1(-0.825,-13.325) -0.825,-12.1 ; 0.4,-6.1 0.4,-6.745 ; v1(0.6,-1.3) v1(1.6,-1.3) 3.4,-3.1 v1(6.7,-3.1) v1(9.5,-3.1) 10,-3.6 10,-8.15 ; v1(4.7,16.7) 4.7,16.1 5.3,15.5 8,15.5 ; 5.7,-14.4 v1(4.1,-14.4) -0.825,-14.4 -0.825,-15.753 -1.472,-16.4 v1(-2.2,-16.4) -13,-16.4 -16.2,-13.2 v1(-16.2,-0.2) -16.2,5.3 ; v1(8,16.7) 8,15.5 ; v1(11.3,16.7) 11.3,16 10.8,15.5 ; -16.2,5.3 -16.2,9.4 ; -4.4,-5.4 -3,-5.4 -1.655,-6.745 0.4,-6.745 ; -0.825,-12.1 -0.825,-11.425 v1(0,-10.6) 0.4,-10.2 0.4,-8.15 ; 0.4,-8.15 0.4,-6.745 ; 0.4,-8.15 10,-8.15 ; 8,15.5 10.8,15.5 ; 10,-8.15 14.65,-8.15 15.8,-7 15.8,-2.4 13,0.4 13,14.8 12.3,15.5 10.8,15.5 ; 5.8,-14.3 v1(6.3,-14.8) v1(6.3,-13.8) 5.8,-14.3
+3V3_CONN: C213.2 D216.K FB201.1 J203.1 | length 6
  L1 (Sig) w0.5: J203.1 -12.587,-5.388 -10.012,-5.388 D216.K -9.95,-5.45 -9.9,-5.45 -9.2,-6.15 C213.2 -8.275,-6.125 -6.975,-6.125 FB201.1
+3V3_SD: C210.2 C211.2 D221.K FB200.1 J202.4 | length 20.6
  L1 (Sig) w0.5: FB200.1 -0.075,1.175 -0.075,2.375 C211.2 0.1,2.55 0.1,3.45 0.2,3.55 C210.2 0.2,5.3 0.55,5.65 1.15,5.65 D221.K 4,5.7 4.88,6.58 J202.4
+5V: C101.2 FB100.2 U100.1 U100.3 | length 8.2
  L1 (Sig) w0.3: U100.3 2.425,-11.825 1.8,-11.2 1.8,-9.3 2.3,-8.8 5.074,-8.8 5.25,-8.976 C101.2
+5V_USB: C100.2 D200.K FB100.1 J200.1
BAR_CSB: R301.1 U301.2 | length 1.6
  L1 (Sig) w0.147: R301.1 -4.35,-12.25 -3.925,-12.675 U301.2
BAR_INT: R300.1 U200.19 U301.5 | length 23.8
  L1 (Sig) w0.147: v1(-7,-1.9) -6.37,-1.27 U200.19 ; U301.5 -0.9,-15.25 R300.1 -0.238,-15.2 0.1,-14.862 0.1,-12.269 0.9,-11.469 0.9,-7.2 v1(-1,-5.3)
  L4 (Sig) w0.147: v1(-7,-1.9) -6.93,-1.83 -6.93,-1.33 -6.6,-1 -4.9,-1 -1.056,-4.844 -1.056,-5.244 v1(-1,-5.3)
CONN_GPIO1: D217.K J203.2 R218.1 | length 6.7
  L1 (Sig) w0.147: J203.2 -11.275,-6.625 -10.7,-7.2 D217.K -7.2,-7.2 -6.9,-7.5 R218.1
CONN_GPIO2: D218.K J203.3 R219.1 | length 7
  L1 (Sig) w0.147: J203.3 -11.425,-7.875 -11,-8.3 -11,-8.6 -10.6,-9 -9.3,-9 -9.1,-8.8 D218.K R219.1
CONN_GPIO3: D219.K J203.4 R220.1 | length 4.6
  L1 (Sig) w0.147: J203.4 -11.475,-9.125 -10.8,-9.8 D219.K -9.35,-9.8 -8.6,-10.55 R220.1
CONN_GPIO4: D220.K J203.5 R221.1 | length 5.5
  L1 (Sig) w0.147: J203.5 -12.595,-10.38 -11.616,-10.38 -11.383,-10.613 -11.383,-11.903 -11.085,-12.2 D220.K R221.1
GND: C100.1 C101.1 C102.1 C103.1 C200.1 C201.1 C202.1 C203.1 C204.1 C205.1 C206.1 C207.1 C208.1 C209.1 C210.1 C211.1 C212.1 C213.1 C214.1 C300.1 C301.1 C302.1 C303.1 C304.1 C305.1 D200.A D201.A D202.A D204.A D205.A D206.A D207.A D208.A D209.A D210.A D211.A D212.A D213.A D214.A D215.A D216.A D217.A D218.A D219.A D220.A D221.A J200.5 J201.5 J202.6 J202.9 J202.11 J202.12 J202.13 J203.6 R100.1 R206.1 R217.1 U100.2 U200.8 U200.23 U200.35 U200.44 U200.47 U200.49 U300.1 U300.9 U300.11 U300.18 U300.25 U301.1 U301.7 Y200.2 Y200.4 | length 54.9
  L1 (Sig) w0.25: v2(-11.7,14.05) -11.7,14.1 -11.075,14.725 -11.075,14.961 -11.05,14.986 -11.05,15.45 U300.1 ; C203.1 -11.143,2.057 U200.8 -9.17,2.057 v2(-8.82,1.707) ; C207.1 -8.87,7.503 U200.47 -8.87,5.057 v2(-8.82,5.007) ; v2(-7.72,5.007) -7.37,5.357 U200.44 ; v2(-4.42,0.607) -4.37,0.557 U200.23 ; v2(-4.42,5.007) -4.37,5.057 U200.35
  L1 (Sig) w0.3: C301.1 -15.6,12.15 -15.389,12.15 -14.814,12.725 -14.25,12.725 U300.11 -13,12.75 v2(-12.8,12.95) ; C302.1 -15.7,14 -15.45,13.75 U300.9 -13.1,13.75 v2(-12.8,14.05) ; U300.25 -12.25,13.45 -11,12.2 U300.18 ; C300.1@-11.6,10.2 -11.6,10.45 C300.1@-11.55,10.5
  L1 (Sig) w0.4: v1(12,-6.5) 12.022,-6.522 13.115,-6.522 J200.5 13.159,-6.522 14.278,-6.522 v1(14.3,-6.5)
  L1 (Sig) w0.5: Y200.2 -15.904,7.579 -14.925,6.6 v1(-14.9,6.6) -14.862,6.562 -14.687,6.562 -13.804,5.679 Y200.4 -13.907,5.476 -13.907,4.393 C200.1 C201.1 ; v1(-14.087,-11.612) -12.612,-11.612 J203.6 ; v1(-13.5,0.9) -13.489,0.911 -12.571,0.911 C209.1 ; v1(-12.2,7.3) C204.1 ; v1(-10.8,-10.8) D219.A ; v1(-10,-14.1) D220.A ; C202.1 -8.887,8.913 -8.887,7.52 C207.1 ; v1(-6.5,16.6) D206.A ; D205.A v1(-4.7,14.2) ; R206.1 -2.35,-7.4 -1.84,-7.91 -1.428,-7.91 v1(-1.39,-7.948) ; J201.5 v1(-0.93,14.67) ; v1(-0.3,16.6) D207.A ; v1(0.3,7.5) R217.1 ; D208.A v1(1.5,13.7) ; D209.A v1(4.8,-0.7) ; D210.A v1(6.2,16.7) ; C100.1 7.4,-13.15 7.4,-13.989 7.492,-14.081 v1(7.492,-14.135) ; D211.A v1(7.6,-0.7) ; v1(8.3,-9.6) D201.A ; v1(8.3,-6.7) D202.A ; D214.A v1(9.5,16.7) ; R100.1 v1(10.9,-16) ; D212.A v1(10.4,-0.7) ; v1(10.725,-12.375) 10.725,-11.525 D200.A ; D213.A v1(12.9,16.7) ; v1(14.4,4.4) 14.41,4.39 15.957,4.39 J202.6 ; J202.12 15.5,0.113 v1(15.5,1.1) ; J202.13 15.5,13.397 v1(15.5,12.2)
  other v1: 1.2,-16.2 -4.4,-14.5 -8,-14 10.5,-14 12.5,-14 14.5,-14 16.5,-14 4,-13.2 12.5,-12.5 2.7,-10.1 -14.5,-10 -14.5,-8 -9.1,-7.9 -3.5,-3.7 -9.9,-3.6 -8.6,-3.6 -7.2,-3.6 -5.7,-3.4 16.5,-1 -15,1 2.9,1.1 3.6,1.7 2.1,3.6 9.773,3.606 2.1,4.6 6,5 -2,7.6 6,8 -10.8,10.3 -9.9,10.3 -9,10.3 14.5,11.25 -10.1,11.4 2,11.5 14.5,16.5
  other v2: -8.82,0.607 -7.72,0.607 -6.62,0.607 -5.52,0.607 -7.72,1.707 -6.62,1.707 -5.52,1.707 -4.42,1.707 -8.82,2.807 -7.72,2.807 -6.62,2.807 -5.52,2.807 -4.42,2.807 -8.82,3.907 -7.72,3.907 -6.62,3.907 -5.52,3.907 -4.42,3.907 -6.62,5.007 -5.52,5.007 -11.7,12.95
  other v3: -6.9,-11.4 -4.4,-9.6 -2.6,-9 8.6,-5.1 11.4,-5.1 5.7,-4.3 -10.9,-2.6 -14.4,2 -14.1,10.5 -6.3,10.5 10.5,13.25 5.3,13.3 7.5,13.3 -10.1,16.8
  other v5: 2.3,-16.2
IMU_CP: C303.2 U300.20 | length 1.3
  L1 (Sig) w0.3: U300.20 -9.15,12.75 C303.2
IMU_INT: U200.45 U300.12 | length 14.4
  L1 (Sig) w0.147: v1(-14.8,11) -14.225,11.575 U300.12 ; v4(-8.057,10.944) -7.97,10.857 -7.97,10.649 -7.952,10.632 -7.952,7.987 -7.6,7.634 -7.6,6.8 -7.818,6.582 -7.818,6.562 -7.87,6.51 U200.45
  L4 (Sig) w0.147: v1(-14.8,11) -13.5,12.3 -9.412,12.3 v4(-8.057,10.944)
IMU_REG: C301.2 U300.10 | length 1.6
  L1 (Sig) w0.3: C301.2 -15.7,13 -15.45,13.25 U300.10
LDO_BYP: C102.2 U100.4
MCU_I2C1_SCL: R201.1 U200.42 U300.23 | length 11.2
  L1 (Sig) w0.147: U300.23 -9.649,14.25 -9.434,14.035 -9.071,14.035 R201.1@-9.035,14 ; R201.1@-8.773,13.773 R201.1 -9,13.5 -8.776,13.276 -7.576,13.276 -6.9,12.6 -6.9,9.077 -6.687,8.865 -6.687,7.719 -6.37,7.402 U200.42
MCU_I2C1_SDA: R202.1 U200.43 U300.24 | length 16.7
  L1 (Sig) w0.147: U300.24 -9.284,14.75 -9,15.034 R202.1 -9.8,15.8 v1(-9.9,15.9)
  L1 (Sig) w0.15: v4(-7.832,12.382) -7.832,11.74 -7.415,11.323 -7.415,8.415 -7.14,8.14 -7.14,7.04 -6.87,6.77 U200.43
  L4 (Sig) w0.15: v1(-9.9,15.9) -9.837,15.9 -9.537,16.2 -7.5,16.2 -6.9,15.6 -6.9,13.314 v4(-7.832,12.382)
MCU_I2C2_SCL: R204.1 U200.21 U301.4 | length 16.4
  L1 (Sig) w0.147: v1(-5.9,-1.9) -5.9,-1.8 -5.37,-1.27 U200.21 ; U301.4 -2.625,-12.625 -1.9,-11.9 R204.1 v1(-1.9,-9.7)
  L4 (Sig) w0.147: v1(-5.9,-1.9) -4.9,-2.9 -4.9,-3.836 -5.4,-4.336 -5.4,-6.414 -4.728,-7.086 -3.48,-7.086 -1.9,-8.666 v1(-1.9,-9.7)
MCU_I2C2_SDA: R203.1 U200.46 U301.3 | length 24.9
  L1 (Sig) w0.147: U200.46 -8.37,6.827 -8.143,7.054 v3(-8.143,7.13) ; v1(-3.3,-9.7) R203.1 -3.275,-10.625 U301.3
  L4 (Sig) w0.147: v3(-8.143,7.13) -8.143,7.021 -8.269,6.895 -8.269,0.185 -8.714,-0.26 -8.714,-2.294 -7.9,-3.108 -7.9,-4.931 -5.131,-7.7 -4.138,-7.7 -3.3,-8.538 v1(-3.3,-9.7)
MCU_LED: D203.A U200.25 | length 4.9
  L1 (Sig) w0.147: U200.25 -2.938,0.057 -2.8,-0.081 -2.8,-0.5 -2.6,-0.7
  L1 (Sig) w0.2: -2.6,-0.7 -2.4,-0.9
  L1 (Sig) w0.3: D203.A -2.35,-4.1 -2.2,-3.95 -2.2,-3.9 -2.1,-3.8 -2.1,-1.2 -2.4,-0.9
MCU_LED_K: D203.K R206.2 | length 1.3
  L1 (Sig) w0.5: R206.2 D203.K
MCU_NRST: C209.2 R210.1 U200.7 | length 29.7
  L1 (Sig) w0.147: v1(-13.5,2) -13.422,1.922 C209.2 -12.51,1.922 -12.283,2.149 -12.283,2.371 -12.097,2.557 U200.7 ; R210.1 v1(3.1,16.6)
  L4 (Sig) w0.147: v1(-13.5,2) -11.7,2 -10,3.7 -10,7.6 -4.3,13.3 -1.2,13.3 2.1,16.6 v1(3.1,16.6)
MCU_OSC_IN: C200.2 U200.5 Y200.1 | length 7.3
  L1 (Sig) w0.147: Y200.1 -13.604,7.579 -12.4,6.375 -12.4,4.95 -12.957,4.393 C200.2 -12.443,4.343 -11.657,3.557 U200.5
MCU_OSC_OUT: R200.2 U200.6 | length 2.9
  L1 (Sig) w0.147: R200.2 -12.941,3.057 U200.6
MCU_PA1: R218.2 U200.11 | length 18.4
  L1 (Sig) w0.147: v1(-12.6,-1.9) -12.6,-1.28 -12.22,-0.9 -11.447,-0.9 -10.799,-0.252 -10.799,0.244 -10.506,0.537 -10.04,0.537 U200.11 ; R218.2@-5.3,-7.55 -4.619,-7.55 -4.3,-7.869 v1(-4.3,-8.8)
  L4 (Sig) w0.147: v1(-12.6,-1.9) -12.6,-3.436 -9.936,-6.1 -8.009,-6.1 -5.309,-8.8 v1(-4.3,-8.8)
MCU_PA2: R219.2 U200.12 | length 19.4
  L1 (Sig) w0.147: v1(-11.5,-1.9) -11.5,-1.877 -10.02,-0.397 U200.12 ; v1(-5.3,-9.8) R219.2
  L4 (Sig) w0.147: v1(-11.5,-1.9) -11.518,-1.882 -11.518,-1.416 -11.734,-1.2 -13.182,-1.2 -13.592,-1.609 -13.592,-3.913 -10.505,-7 -8.5,-7 -5.756,-9.744 -5.356,-9.744 v1(-5.3,-9.8)
MCU_PA3: R220.2 U200.13 | length 21.8
  L1 (Sig) w0.147: v1(-10.4,-1.9) -10.294,-1.794 -10.294,-1.517 -9.605,-0.828 -9.418,-0.828 -9.37,-0.78 U200.13 ; R220.2 v1(-6.6,-10.6)
  L4 (Sig) w0.147: v1(-10.4,-1.9) -10.4,-1.2 -11.137,-0.463 -13.622,-0.463 -14.4,-1.241 -14.4,-4.634 -8.434,-10.6 v1(-6.6,-10.6)
MCU_PA4: R221.2 U200.14 | length 26.2
  L1 (Sig) w0.147: v1(-9.4,-1.9) -8.87,-1.37 U200.14 ; R221.2 v1(-6.6,-12.2)
  L4 (Sig) w0.147: v1(-9.4,-1.9) -9.4,-0.8 -10.4,0.2 -14.217,0.2 -15.181,-0.764 -15.181,-5.319 -8.3,-12.2 v1(-6.6,-12.2)
MCU_SDIO_CK: R216.2 U200.28 | length 12.7
  L1 (Sig) w0.147: U200.28 -2.483,1.557 -2.1,1.174 v4(-2.1,1.1) ; v1(4.8,-4.3) R216.2
  L4 (Sig) w0.147: v4(-2.1,1.1) -1.5,1.1 -0.7,0.3 -0.7,-1.423 2.177,-4.3 v1(4.8,-4.3)
MCU_SDIO_CMD: D210.K J202.3 R211.1 U200.16 | length 45.4
  L1 (Sig) w0.147: v1(4.7,14) R211.1 D210.K 6.2,10.3 8.82,7.68 J202.3
  L1 (Sig) w0.15: v1(-8.013,-1.91) -8.013,-1.761 -7.87,-1.618 U200.16
  L4 (Sig) w0.15: v1(-8.013,-1.91) -8.013,-1.213 -7.2,-0.4 -7.2,7.6 -5.4,9.4 3.2,9.4 4.7,10.9 v1(4.7,14)
MCU_SDIO_D0: D211.K J202.7 R212.1 U200.40 | length 45.3
  L1 (Sig) w0.147: v3(-5.6,8.4) -5.6,8.342 -5.37,8.112 U200.40 ; v1(8.6,-4.3) R212.1 8.6,0.85 11.03,3.28 11.236,3.28 11.31,3.28 ccw(c11.31,3.553) 11.583,3.553 11.583,4.4 cw(c11.857,4.4) 12.13,4.4 12.13,3.099 ccw(c12.403,3.099) 12.677,3.099 12.677,4.4 cw(c12.95,4.4) 13.224,4.4 13.224,3.553 ccw(c13.497,3.553) 13.497,3.28 13.989,3.28 J202.7
  L4 (Sig) w0.147: v3(-5.6,8.4) -5.6,7.7 -3.7,5.8 -3.7,0.5 2.3,-5.5 7,-5.5 8.144,-4.356 8.544,-4.356 v1(8.6,-4.3)
MCU_SDIO_D1: D212.K J202.8 R213.1 U200.29 | length 45.6
  L1 (Sig) w0.147: U200.29 -3.215,2.062 v4(-2.046,2.062) ; v1(11.4,-4.3) R213.1 11.4,-0.35 11.506,-0.244 11.558,-0.192 ccw(c11.365,0.001) 11.558,0.194 11.48,0.272 cw(c11.674,0.465) 11.48,0.658 cw(c11.674,0.465) 11.867,0.658 12.652,-0.126 ccw(c12.845,0.067) 13.038,-0.126 ccw(c12.845,0.067) 13.038,0.261 12.254,1.045 cw(c12.447,1.238) 12.254,1.432 cw(c12.447,1.238) 12.64,1.432 13.425,0.647 ccw(c13.618,0.841) 13.812,0.647 ccw(c13.618,0.841) 13.812,1.034 13.027,1.818 cw(c13.22,2.012) 13.027,2.205 cw(c13.22,2.012) 13.414,2.205 13.491,2.128 ccw(c13.684,2.321) 13.878,2.128 13.93,2.18 14.358,2.18 J202.8
  L4 (Sig) w0.147: v4(-2.046,2.062) 0.188,2.062 0.5,1.75 0.552,1.698 ccw(c0.745,1.891) 0.939,1.698 0.96,1.72 cw(c1.154,1.526) 1.347,1.72 cw(c1.154,1.526) 1.347,1.333 0.843,0.829 ccw(c1.036,0.636) 0.843,0.442 ccw(c1.036,0.636) 1.229,0.442 1.734,0.946 cw(c1.927,0.753) 2.12,0.946 cw(c1.927,0.753) 2.12,0.56 1.616,0.056 ccw(c1.809,-0.138) 1.616,-0.331 ccw(c1.809,-0.138) 2.003,-0.331 2.507,0.173 cw(c2.7,-0.02) 2.894,0.173 cw(c2.7,-0.02) 2.894,-0.213 2.872,-0.235 ccw(c3.065,-0.429) 2.872,-0.622 3.478,-1.228 3.95,-1.7 5.25,-1.7 5.323,-1.7 ccw(c5.323,-1.427) 5.597,-1.427 5.597,-0.346 cw(c5.87,-0.346) 6.144,-0.346 6.144,-1.649 ccw(c6.417,-1.649) 6.69,-1.649 6.69,-1.422 cw(c6.964,-1.422) 7.237,-1.422 7.237,-1.427 ccw(c7.511,-1.427) 7.511,-1.7 7.988,-1.7 10.3,-1.7 10.418,-1.818 10.47,-1.87 ccw(c10.663,-1.677) 10.857,-1.87 11.603,-1.123 cw(c11.797,-1.317) 11.99,-1.123 cw(c11.797,-1.317) 11.99,-1.51 11.243,-2.257 ccw(c11.437,-2.45) 11.243,-2.643 11.4,-2.8 11.4,-3.353 v1(11.4,-4.3)
MCU_SDIO_D2: D213.K J202.1 R214.1 U200.30 | length 45.9
  L1 (Sig) w0.147: U200.30 -2.543,2.557 v4(-2.2,2.9) ; v1(11.3,14) R214.1 D213.K 12.9,10.35 13.385,9.865 15.952,9.865 J202.1
  L4 (Sig) w0.147: v4(-2.2,2.9) 2.8,2.9 6.42,6.52 6.859,6.958 cw(c7.052,6.765) 7.245,6.958 7.97,6.233 ccw(c8.163,6.427) 8.357,6.233 ccw(c8.163,6.427) 8.357,6.62 7.509,7.468 cw(c7.702,7.661) 7.509,7.854 cw(c7.702,7.661) 7.896,7.854 8.743,7.007 ccw(c8.937,7.2) 9.13,7.007 ccw(c8.937,7.2) 9.13,7.393 8.282,8.241 cw(c8.476,8.434) 8.282,8.628 cw(c8.476,8.434) 8.669,8.628 9.517,7.78 ccw(c9.71,7.973) 9.903,7.78 ccw(c9.71,7.973) 9.903,8.167 9.055,9.014 cw(c9.249,9.208) 9.055,9.401 cw(c9.249,9.208) 9.442,9.401 10.29,8.553 ccw(c10.483,8.747) 10.677,8.553 ccw(c10.483,8.747) 10.677,8.94 9.829,9.788 cw(c10.022,9.981) 9.829,10.174 cw(c10.022,9.981) 10.215,10.174 11.063,9.327 ccw(c11.257,9.52) 11.45,9.327 ccw(c11.257,9.52) 11.45,9.713 10.725,10.438 cw(c10.918,10.631) 10.725,10.825 11.213,11.313 11.3,11.4 v1(11.3,14)
MCU_SDIO_D3: D214.K J202.2 R215.1 U200.41 | length 45.6
  L1 (Sig) w0.147: v1(8,14) R215.1 D214.K 9.5,14.243 9.5,13.398 cw(c9.227,13.398) 9.227,13.125 8.272,13.125 ccw(c8.272,12.851) 8.272,12.578 9.661,12.578 cw(c9.661,12.304) 9.661,12.031 7.853,12.031 ccw(c7.853,11.758) 7.853,11.484 9.661,11.484 cw(c9.661,11.211) 9.661,10.937 7.853,10.937 ccw(c7.853,10.664) 7.853,10.39 9.227,10.39 cw(c9.227,10.117) 9.5,10.117 9.5,10.044 9.5,9.75 10.47,8.78 J202.2
  L1 (Sig) w0.15: v3(-6,9.8) -6,9.724 -6.212,9.512 -6.212,7.887 -5.87,7.545 U200.41
  L4 (Sig) w0.15: v3(-6,9.8) -4.736,11.064 -4.736,11.213 -3.549,12.4 -0.9,12.4 1.3,14.6 7.4,14.6 v1(8,14)
MCU_SWCLK: R208.1 U200.37 | length 1.9
  L1 (Sig) w0.147: U200.37 -3.393,6.207 -3.2,6.4 R208.1 R208.1@-3.27,7.43
MCU_SWDIO: R207.1 U200.34 | length 3.5
  L1 (Sig) w0.147: U200.34 -2.564,4.557 -2.392,4.386 -1.214,4.386 -0.7,4.9 R207.1
MCU_SWO: R209.1 U200.39 | length 1.5
  L1 (Sig) w0.147: U200.39 -4.87,7.273 -4.643,7.5 R209.1 R209.1@-4.57,7.47
MCU_USB_D_N: D201.K J200.2 U200.32 | length 24.1
  L1 (Sig) w0.153: U200.32 -2.919,3.557 -2.847,3.629 -1.829,3.629 -1.456,3.256 -1.456,-1.144 5.746,-8.346 8.837,-8.346 8.868,-8.377 8.977,-8.377 D201.K ; D201.K@9.2,-8.347 12.99,-8.347 J200.2
MCU_USB_D_P: D202.K J200.3 U200.33 | length 24
  L1 (Sig) w0.153: U200.33 -2.919,4.057 -2.847,3.985 -1.681,3.985 -1.1,3.404 -1.1,-0.996 5.894,-7.99 8.86,-7.99 8.98,-7.87 D202.K@9.089,-7.87 ; D202.K 9.25,-7.7 9.541,-7.991 12.99,-7.991 J200.3
MCU_VCAP: C208.2 U200.22 | length 1.4
  L1 (Sig) w0.25: U200.22 -4.87,-1.58 C208.2
NRST: D207.K J201.3 R210.2 | length 5.3
  L1 (Sig) w0.147: J201.3 -1.728,13.537 -0.916,13.537 0.566,15.019 0.566,15.566 D207.K R210.2
PWR_LED_K: D100.K R100.2 | length 1.5
  L1 (Sig) w0.5: D100.K R100.2
SD_CARD_DETECT: D215.K J202.10 R217.2 U200.26 | length 17.5
  L1 (Sig) w0.147: U200.26 -3.2,0.537 -2.402,0.537 -2.187,0.322 -2.187,0.087 v4(-2.1,0) ; v1(0.3,8.7) 0.5,8.5 R217.2 D215.K 2.397,10 3.267,9.13 J202.10
  L4 (Sig) w0.147: v4(-2.1,0) -3,0.9 -3,5.4 v1(0.3,8.7)
SD_CLK: D209.K J202.5 R216.1 | length 32.7
  L1 (Sig) w0.147: R216.1 5.8,1.8 5.816,1.816 5.868,1.868 ccw(c5.675,2.061) 5.868,2.255 5.338,2.785 cw(c5.531,2.978) 5.338,3.172 cw(c5.531,2.978) 5.724,3.172 6.962,1.934 ccw(c7.155,2.128) 7.348,1.934 ccw(c7.155,2.128) 7.348,2.321 6.111,3.558 cw(c6.304,3.752) 6.111,3.945 cw(c6.304,3.752) 6.498,3.945 7.735,2.708 ccw(c7.928,2.901) 8.122,2.708 ccw(c7.928,2.901) 8.122,3.094 6.884,4.332 cw(c7.078,4.525) 6.884,4.718 cw(c7.078,4.525) 7.271,4.718 8.508,3.481 ccw(c8.702,3.674) 8.895,3.481 ccw(c8.702,3.674) 8.895,3.868 7.658,5.105 cw(c7.851,5.298) 7.658,5.492 cw(c7.851,5.298) 8.044,5.492 9.243,4.293 ccw(c9.436,4.486) 9.63,4.293 ccw(c9.436,4.486) 9.63,4.68 9.348,4.961 cw(c9.541,5.155) 9.348,5.348 9.48,5.48 9.791,5.48 J202.5
SWCLK: D205.K J201.4 R208.2 | length 8.2
  L1 (Sig) w0.147: R208.2 -3.2,9.1 -4.9,10.8 -4.9,12.5 D205.K -4.3,13.2 -4.1,13.4 J201.4
SWDIO: D204.K J201.2 R207.2 | length 8.1
  L1 (Sig) w0.147: J201.2 -3.7,11.565 -3.7,10.4 -2.929,9.629 -1.048,9.629 -0.7,9.281 D204.K R207.2
SWO: D206.K J201.6 R209.2 | length 11.3
  L1 (Sig) w0.147: R209.2 -4.6,9.6 -6.358,11.358 -6.358,15.342 -6.1,15.6 D206.K -5,15.6 -4.07,14.67 J201.6
XTAL_IN: C201.2 R200.1 Y200.3 | length 4.3
  L1 (Sig) w0.147: Y200.3 -15.989,5.664 C201.2 -15.989,3.589 -15.473,3.073 R200.1
pads on no net: J200.4 J200.6 J200.7 J200.8 J200.9 J200.10 J200.11 J201.MH J203. U200.2 U200.3 U200.4 U200.10 U200.15 U200.17 U200.18 U200.20 U200.27 U200.31 U200.38 U300.2 U300.3 U300.4 U300.5 U300.6 U300.7 U300.14 U300.15 U300.16 U300.17 U300.19 U300.21 U300.22

## Polygon pours and split planes (outlines as drawn)
LDO_BYP on L1 (Sig) "LDO_BYP_L01_P023" (solid, pour order 23): 2.2,-14.7 2.6,-15.1 3.3,-15.1 3.4,-15 3.4,-13.4 3.2,-13.2 0.9,-13.2 0.7,-13.4 0.7,-14.6 0.8,-14.7
+3V3 on L1 (Sig) "+3V3_L01_P022" (solid, pour order 22): -4.3,-4.1 -4,-4.4 -4,-6.5 -4.2,-6.7 -6,-6.7 -6.1,-6.6 -6.1,-4.2 -6,-4.1
+5V_USB on L1 (Sig) "+5V_USB_L01_P021" (solid, pour order 21): 8.2,-13.6 8.3,-13.7 9.7,-13.7 9.9,-13.5 9.9,-11.2 10.2,-10.9 11.8,-10.9 12,-10.7 12,-9.6 12.2,-9.4 13.8,-9.4 13.9,-9.3 13.9,-9 13.8,-8.9 10.2,-8.9 10,-9.1 10,-10 9.5,-10.5 8.4,-10.5 8.2,-10.7
GND on L1 (Sig) "GND_L01_P020" (solid, pour order 20): 2.4,-15.4 1.9,-14.9 0.8,-14.9 0.7,-15 0.7,-16.6 0.9,-16.8 4,-16.8 4.1,-16.7 4.1,-15.5 4,-15.4
GND on L1 (Sig) "GND_L01_P019" (solid, pour order 19): -6.5,-13.8 -5.6,-13.8 -5.1,-13.3 -4.4,-13.3 -4.3,-13.4 -4.3,-14 -3.7,-14.6 -3.7,-16.9 -3.8,-17 -4.5,-17 -4.6,-16.9 -4.6,-16 -4.4,-15.8 -4.2,-15.8 -4.1,-15.7 -4.1,-15 -4.2,-14.9 -4.6,-14.9 -4.9,-14.6 -6.5,-14.6 -6.6,-14.5 -6.6,-13.9
GND on L1 (Sig) "GND_L01_P018" (solid, pour order 18): -9.5,-8.6 -9.2,-8.3 -7.9,-8.3 -7.7,-8.1 -7.7,-7.5 -7.8,-7.4 -8.8,-7.4 -8.9,-7.5 -9.3,-7.5 -9.6,-7.8 -10.5,-7.8 -10.6,-7.9 -10.6,-8.5 -10.5,-8.6
GND on L1 (Sig) "GND_L01_P017" (solid, pour order 17): -3.7,-2.4 -4.1,-2.8 -10.3,-2.8 -10.6,-3.1 -10.6,-4.7 -10.5,-4.8 -9.5,-4.8 -9.1,-5.2 -7.7,-5.2 -7.6,-5.3 -6.4,-5.3 -6.3,-5.2 -6.3,-4.1 -6.1,-3.9 -4,-3.9 -3.8,-4.1 -3.2,-4.1 -3,-3.9 -3,-3.6 -2.7,-3.3 -2.7,-2.5 -2.8,-2.4 -3.1,-2.4
GND on L1 (Sig) "GND_L01_P016" (solid, pour order 16): 2,10.6 2.2,10.8 3.8,10.8 3.9,10.9 3.9,12.1 3.8,12.2 1.9,12.2 1.4,11.7 0.8,11.7 0.6,11.5 0.6,10.7 0.7,10.6
GND on L1 (Sig) "GND_L01_P015" (solid, pour order 15): -1.5,6.2 -1.4,6.3 -1.4,7.9 -1.3,8 -1.3,9 -1.4,9.1 -2.3,9.1 -2.5,8.9 -2.5,6.3 -2.4,6.2
GND on L1 (Sig) "GND_L01_P014" (solid, pour order 14): -9.6,11.9 -9.5,12 -8.5,12 -8.4,11.9 -8.4,11.2 -8.6,11 -8.6,10 -8.4,9.8 -8.4,8.1 -8.6,7.9 -8.6,7.1 -8.7,7 -9.2,7 -9.3,7.1 -9.3,8.3 -9.4,8.4 -9.4,9.6 -9.6,9.8 -12.1,9.8 -12.2,9.9 -12.2,10.8 -12.1,10.9 -11.3,10.9 -11.2,11 -11.2,11.65 -10.95,11.9
+3V3 on L1 (Sig) "+3V3_L01_P011" (solid, pour order 11): -10.4,5.4 -10.6,5.2 -10.6,5 -10.7,4.9 -11.7,4.9 -11.8,5 -11.8,6.7 -11.7,6.8 -10.5,6.8 -10.4,6.9 -10.4,8.1 -10.5,8.2 -11.5,8.2 -11.7,8.4 -11.7,9.4 -11.5,9.6 -9.8,9.6 -9.7,9.5 -9.7,8.4 -9.5,8.2 -9.5,6.9 -9.2,6.6 -9.2,5.9 -9.3,5.8 -9.5,5.8 -9.6,5.7 -9.6,5.5 -9.7,5.4
+3V3 on L1 (Sig) "+3V3_L01_P007" (solid, pour order 7): 2.1,0.2 2.2,0.1 2.2,-1.5 1.9,-1.8 0.3,-1.8 0,-1.5 0,-1.1 -0.2,-0.9 -0.7,-0.9 -0.8,-0.8 -0.8,0.1 -0.7,0.2
GND on L1 (Sig) "GND_L01_P006" (solid, pour order 6): 3.4,0.6 4.1,1.3 4.1,5 4,5.1 0.8,5.1 0.7,5 0.7,4.2 0.8,4.1 0.8,0.7 0.9,0.6
GND on L1 (Sig) "GND_L01_P005" (solid, pour order 5): 4.3,-13.6 4.4,-13.5 4.4,-9.3 4.3,-9.2 2.5,-9.2 2.2,-9.5 2.2,-10.5 2.4,-10.7 3.3,-10.7 3.6,-11 3.6,-13.5 3.7,-13.6
+5V on L1 (Sig) "+5V_L01_P004" (solid, pour order 4): 4.7,-12.8 5.6,-12.8 6.2,-12.2 7.8,-12.2 7.9,-12.1 7.9,-10.9 7.8,-10.8 6.8,-10.8 6.1,-10.1 6.1,-9.5 5.8,-9.2 4.7,-9.2 4.6,-9.3 4.6,-12.7
+3V3 on L1 (Sig) "+3V3_L01_P003" (solid, pour order 3): 3.9,-13.9 4.4,-13.9 4.6,-13.7 4.6,-13.3 4.7,-13.2 6.3,-13.2 6.7,-13.6 6.7,-15.1 6.4,-15.4 5.9,-15.4 5.7,-15.6 5.7,-16.7 5.6,-16.8 4.5,-16.8 4.4,-16.7 4.4,-15.5 3.7,-14.8 3.7,-14.1
GND on L3 (GND) "GND_L3" (solid, pour order 0): -17,14.5 -14.5,17 14.5,17 17,14.5 17,-14.5 14.5,-17 -14.5,-17 -17,-14.5
GND on L2 (GND) "GND_L2" (solid, pour order 1): -17,14.5 -14.5,17 14.5,17 17,14.5 17,-14.5 14.5,-17 -14.5,-17 -17,-14.5

## Silkscreen, mask and mechanical layers (free items; w line width, h text height)
Top Overlay:
  region: 0.693,-2.217 0.69,-2.273 0.677,-2.277 0.551,-2.274 0.546,-2.27 0.548,-2.154 0.559,-2.151 0.688,-2.154 0.693,-2.158 0.693,-2.214
  region: 2.584,-7.713 2.591,-7.714 2.594,-7.726 2.591,-7.741 2.594,-7.75 2.592,-7.816 2.594,-7.829 2.586,-7.836 2.566,-7.839 2.557,-7.836 2.471,-7.838 2.449,-7.833 2.447,-7.717 2.452,-7.713 2.472,-7.71 2.582,-7.711
  text "SD" at 14.317,14.45 h1
  text "SWD" at -7.683,10.85 h1
  text "GPIO" at -16.799,-1.95 h1
  text "WARROX" at 0.754,-5.996 h1.52
  text "USB" at 13.917,-13.75 h1
  text "ON" at 7.35,-15.35 h0.8
  text "Shashank" at -13.996,-16.996 h1.52
Bottom Overlay:
  region: -2.8,-1.436 -2.803,-1.434 -2.8,-1.431 -2.798,-1.434
Top Courtyard:
  lines w0.2: -20,-18.73 ccw(c-18.73,-18.73) -18.73,-20 -16.23,-20 ccw(c-16.23,-18.77) -15,-18.77 cw(c-13.73,-18.77) -13.73,-17.5 13.77,-17.5 cw(c13.77,-18.73) 15,-18.73 ccw(c16.27,-18.73) 16.27,-20 18.73,-20 ccw(c18.73,-18.73) 20,-18.73 20,-16.5 ccw(c18.5,-16.5) 18.5,-15 cw(c18.5,-14) 17.5,-14 17.5,12.5 17.5,14 cw(c18.5,14) 18.5,15 ccw(c18.5,16.5) 20,16.5 20,18.293 20,18.73 ccw(c18.73,18.73) 18.73,20 16.23,20 ccw(c16.23,18.77) 15,18.77 cw(c13.73,18.77) 13.73,17.5 -14.5,17.5 cw(c-14.5,18) -15,18 -15,18.73 ccw(c-16.27,18.73) -16.27,20 -17.5,20 -18.73,20 ccw(c-18.73,18.73) -20,18.73 -20,16.23 ccw(c-18.77,16.23) -18.77,15 cw(c-18.77,13.73) -17.5,13.73 -17.5,-13.77 cw(c-18.73,-13.77) -18.73,-15 ccw(c-18.73,-16.27) -20,-16.27 -20,-18.73